# EAGLE board Analog-Digital-Mux_Breakout_Panel_v11 (EAGLE 7.4.0), part 1 of 3
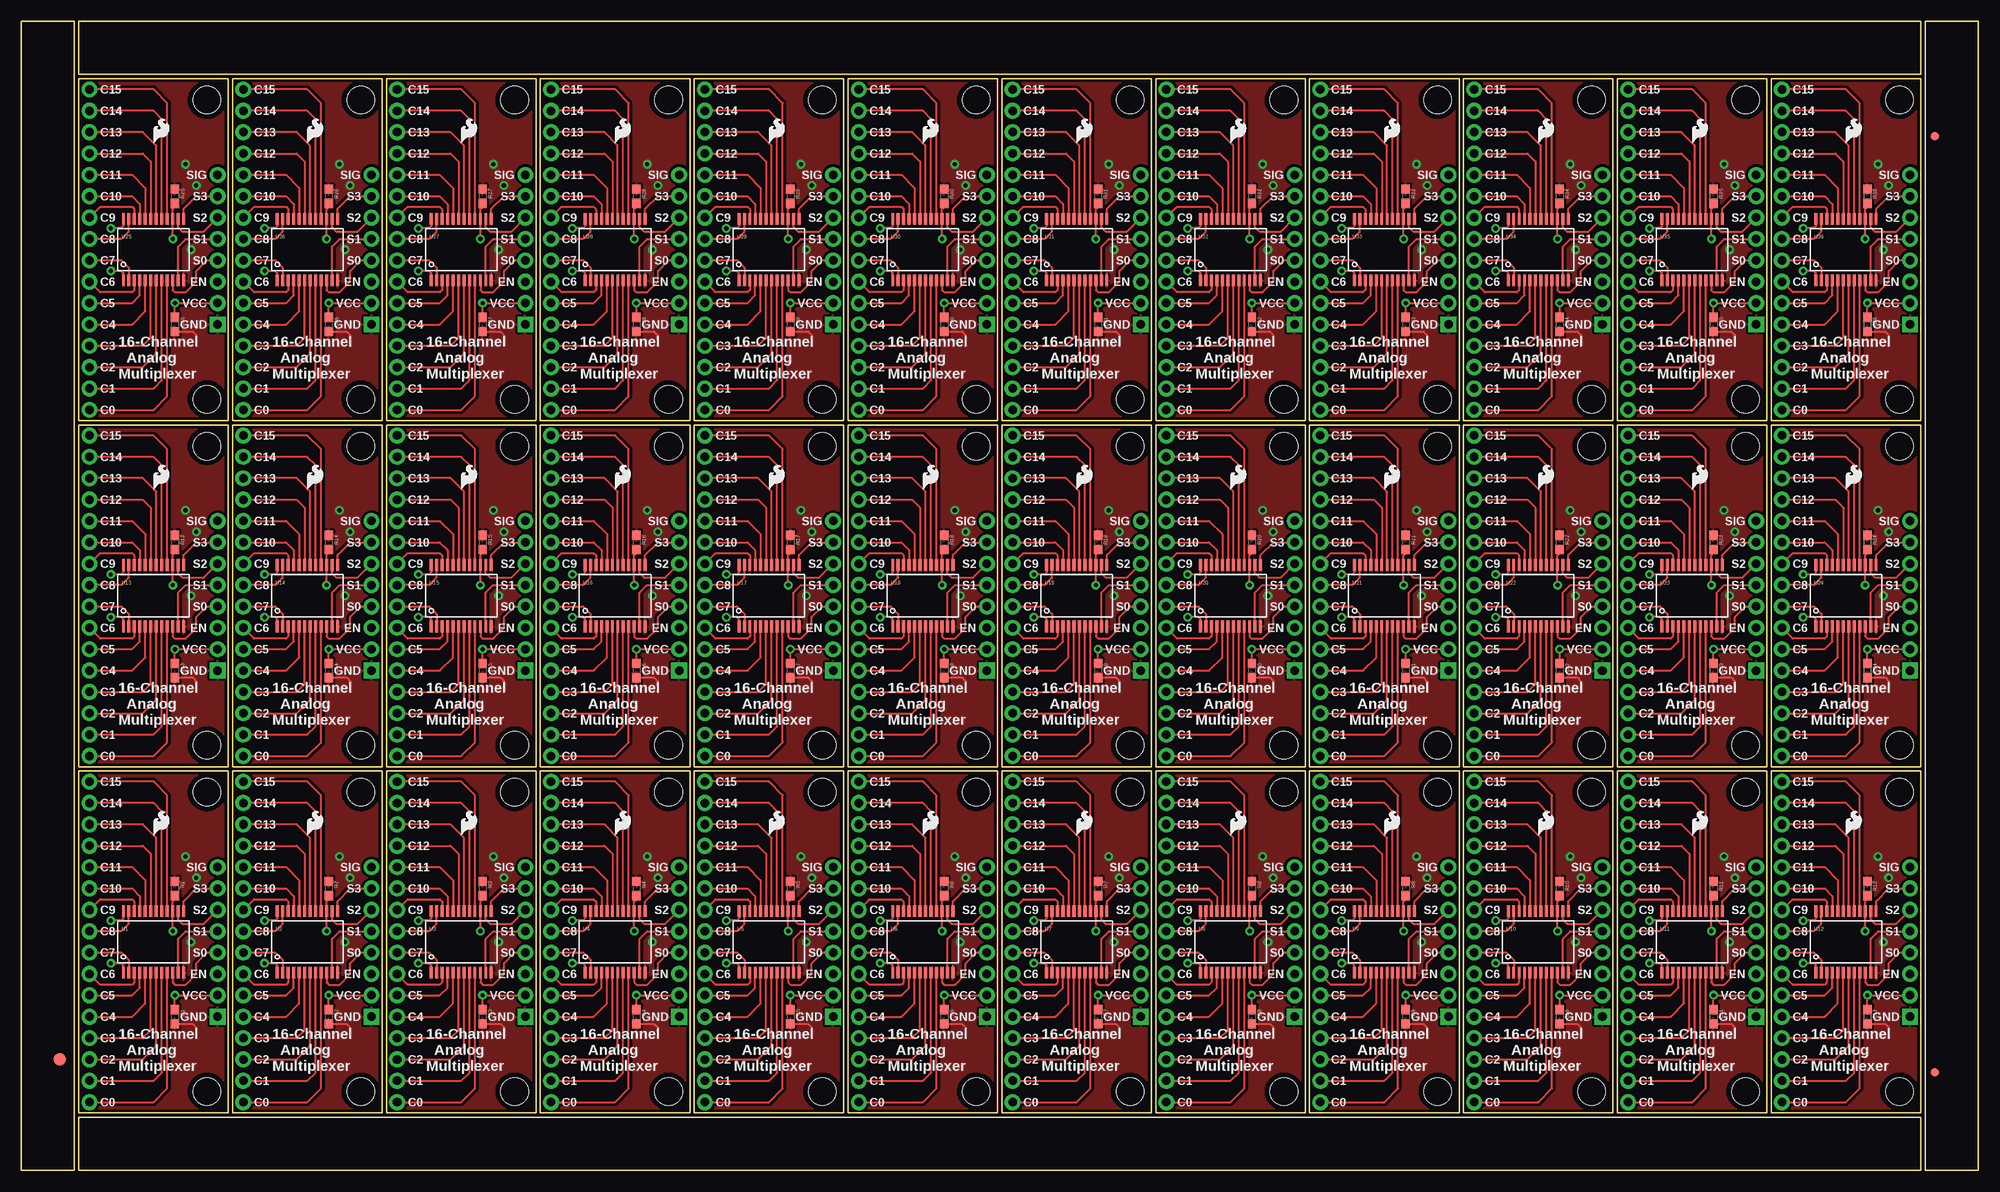
[diagram p0: board, top side]
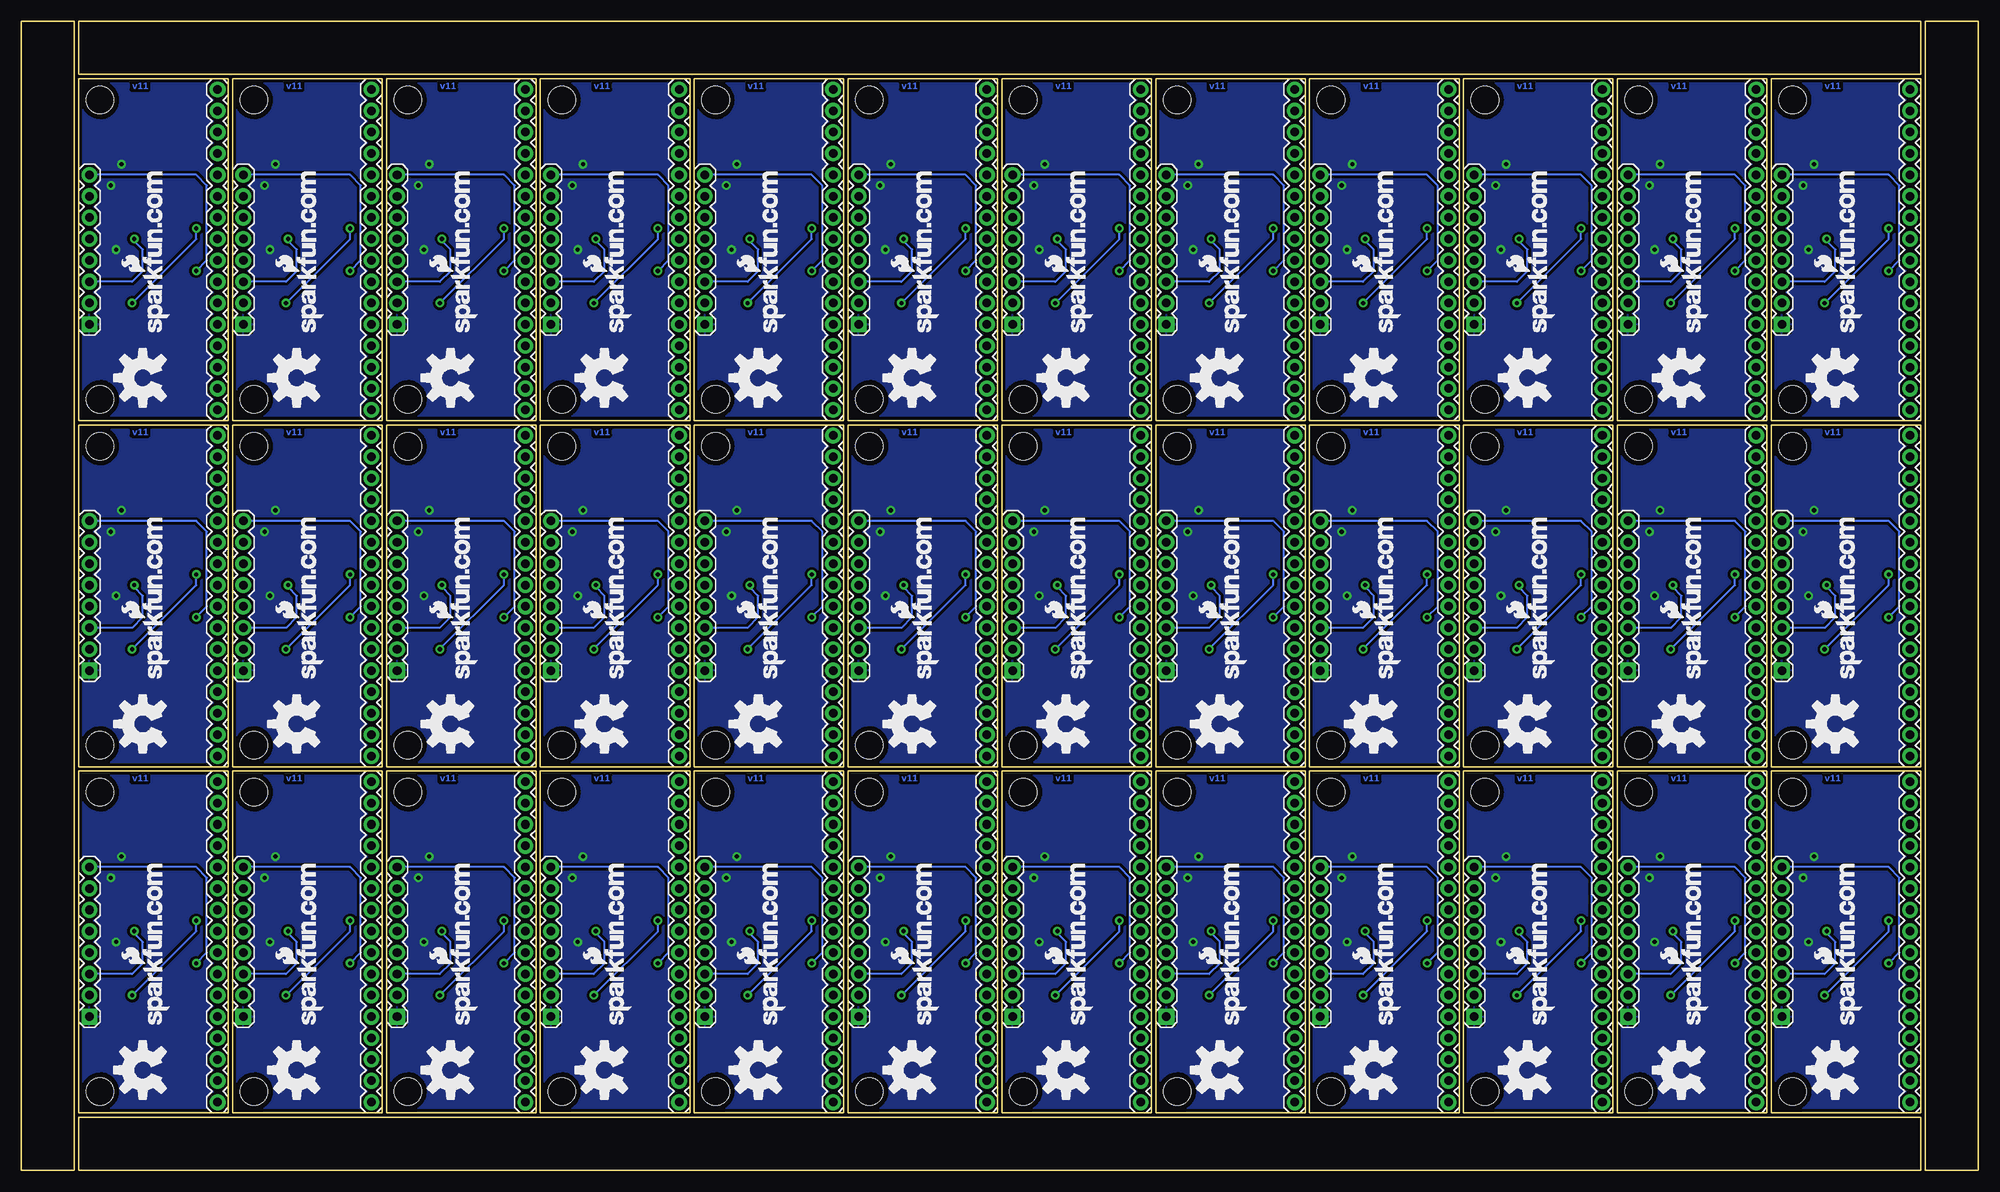
[diagram p1: board, bottom side, seen from below]

Size 232.66 x 136.65 mm. Coordinates in mm from the lower left corner, seen from the top.
Outline: 6.35,79.25 6.35,0 0,0 0,29.72
Outline: 0,27.18 0,136.65 6.35,136.65 6.35,76.71
Outline: 79.25,0 6.86,0 6.86,6.35 29.72,6.35
Outline: 27.18,6.35 225.81,6.35 225.81,0 76.71,0
Outline: 232.66,79.25 232.66,0 226.31,0 226.31,29.72
Outline: 226.31,27.18 226.31,136.65 232.66,136.65 232.66,76.71
Outline: 153.42,136.65 225.81,136.65 225.81,130.3 202.95,130.3
Outline: 205.49,130.3 6.86,130.3 6.86,136.65 155.96,136.65
Outline: 6.86,6.86 24.64,6.86 24.64,47.5 6.86,47.5 6.86,6.86
Outline: 25.15,6.86 42.93,6.86 42.93,47.5 25.15,47.5 25.15,6.86
Outline: 43.43,6.86 61.21,6.86 61.21,47.5 43.43,47.5 43.43,6.86
Outline: 61.72,6.86 79.5,6.86 79.5,47.5 61.72,47.5 61.72,6.86
Outline: 80.01,6.86 97.79,6.86 97.79,47.5 80.01,47.5 80.01,6.86
Outline: 98.3,6.86 116.08,6.86 116.08,47.5 98.3,47.5 98.3,6.86
Outline: 116.59,6.86 134.37,6.86 134.37,47.5 116.59,47.5 116.59,6.86
Outline: 134.87,6.86 152.65,6.86 152.65,47.5 134.87,47.5 134.87,6.86
Outline: 153.16,6.86 170.94,6.86 170.94,47.5 153.16,47.5 153.16,6.86
Outline: 171.45,6.86 189.23,6.86 189.23,47.5 171.45,47.5 171.45,6.86
Outline: 189.74,6.86 207.52,6.86 207.52,47.5 189.74,47.5 189.74,6.86
Outline: 208.03,6.86 225.81,6.86 225.81,47.5 208.03,47.5 208.03,6.86
Outline: 6.86,48.01 24.64,48.01 24.64,88.65 6.86,88.65 6.86,48.01
Outline: 25.15,48.01 42.93,48.01 42.93,88.65 25.15,88.65 25.15,48.01
Outline: 43.43,48.01 61.21,48.01 61.21,88.65 43.43,88.65 43.43,48.01
Outline: 61.72,48.01 79.5,48.01 79.5,88.65 61.72,88.65 61.72,48.01
Outline: 80.01,48.01 97.79,48.01 97.79,88.65 80.01,88.65 80.01,48.01
Outline: 98.3,48.01 116.08,48.01 116.08,88.65 98.3,88.65 98.3,48.01
Outline: 116.59,48.01 134.37,48.01 134.37,88.65 116.59,88.65 116.59,48.01
Outline: 134.87,48.01 152.65,48.01 152.65,88.65 134.87,88.65 134.87,48.01
Outline: 153.16,48.01 170.94,48.01 170.94,88.65 153.16,88.65 153.16,48.01
Outline: 171.45,48.01 189.23,48.01 189.23,88.65 171.45,88.65 171.45,48.01
Outline: 189.74,48.01 207.52,48.01 207.52,88.65 189.74,88.65 189.74,48.01
Outline: 208.03,48.01 225.81,48.01 225.81,88.65 208.03,88.65 208.03,48.01
Outline: 6.86,89.15 24.64,89.15 24.64,129.79 6.86,129.79 6.86,89.15
Outline: 25.15,89.15 42.93,89.15 42.93,129.79 25.15,129.79 25.15,89.15
Outline: 43.43,89.15 61.21,89.15 61.21,129.79 43.43,129.79 43.43,89.15
Outline: 61.72,89.15 79.5,89.15 79.5,129.79 61.72,129.79 61.72,89.15
Outline: 80.01,89.15 97.79,89.15 97.79,129.79 80.01,129.79 80.01,89.15
Outline: 98.3,89.15 116.08,89.15 116.08,129.79 98.3,129.79 98.3,89.15
Outline: 116.59,89.15 134.37,89.15 134.37,129.79 116.59,129.79 116.59,89.15
Outline: 134.87,89.15 152.65,89.15 152.65,129.79 134.87,129.79 134.87,89.15
Outline: 153.16,89.15 170.94,89.15 170.94,129.79 153.16,129.79 153.16,89.15
Outline: 171.45,89.15 189.23,89.15 189.23,129.79 171.45,129.79 171.45,89.15
Outline: 189.74,89.15 207.52,89.15 207.52,129.79 189.74,129.79 189.74,89.15
Outline: 208.03,89.15 225.81,89.15 225.81,129.79 208.03,129.79 208.03,89.15
Copper layers (1*16): Top 0.035mm / dielectric 1.5mm / Bottom 0.035mm
Design rules "SparkFun": minimum track width 8mil, minimum drill 20mil, track to track 8mil, track to pad 8mil, pad to pad 8mil, via to via 8mil, smd to smd 8mil, copper to edge 10mil, drill to drill 8mil, minimum pad ring 12mil, minimum via ring 10mil, stop-mask expansion 4mil, vias tented up to drill 25mil, thermal gap 10mil

## Footprints (pad centres in the part's own frame; a part is rotated, then mirrored left to right if it is on the bottom)
0603 = smd 1.1 x 1: 1 -0.85,0; 2 0.85,0
FIDUCIAL-1.5X3 = smd 1.5 x 1.5: 1 0,0
FIDUCIAL-1X2 = smd 1 x 1: 1 0,0
1X16 = drill 1.016 pad 1.88: 1 0,0; 2 2.54,0; 3 5.08,0; 4 7.62,0; 5 10.16,0; 6 12.7,0; 7 15.24,0; 8 17.78,0; 9 20.32,0; 10 22.86,0; 11 25.4,0; 12 27.94,0; 13 30.48,0; 14 33.02,0; 15 35.56,0; 16 38.1,0
1X08 = drill 1.016 pad 1.88 square: 1 0,0 | drill 1.016 pad 1.88: 2 2.54,0; 3 5.08,0; 4 7.62,0; 5 10.16,0; 6 12.7,0; 7 15.24,0; 8 17.78,0
STAND-OFF = hole 3.302: 0,0
SSOP24 = smd 0.348 x 1.397: 1 -3.575,-3.656; 2 -2.925,-3.656; 3 -2.275,-3.656; 4 -1.625,-3.656; 5 -0.975,-3.656; 6 -0.325,-3.656; 7 0.325,-3.656; 8 0.975,-3.656; 9 1.625,-3.656; 10 2.275,-3.656; 11 2.925,-3.656; 12 3.575,-3.656; 13 3.575,3.656; 14 2.925,3.656; 15 2.275,3.656; 16 1.625,3.656; 17 0.975,3.656; 18 0.325,3.656; 19 -0.325,3.656; 20 -0.975,3.656; 21 -1.625,3.656; 22 -2.275,3.656; 23 -2.925,3.656; 24 -3.575,3.656

## Placement (x,y rotation side)
C1  0.1uF  [0603]  18.29,18.29 270 top
C2  0.1uF  [0603]  36.58,18.29 270 top
C3  0.1uF  [0603]  54.86,18.29 270 top
C4  0.1uF  [0603]  73.15,18.29 270 top
C5  0.1uF  [0603]  91.44,18.29 270 top
C6  0.1uF  [0603]  109.73,18.29 270 top
C7  0.1uF  [0603]  128.02,18.29 270 top
C8  0.1uF  [0603]  146.3,18.29 270 top
C9  0.1uF  [0603]  164.59,18.29 270 top
C10  0.1uF  [0603]  182.88,18.29 270 top
C11  0.1uF  [0603]  201.17,18.29 270 top
C12  0.1uF  [0603]  219.46,18.29 270 top
C13  0.1uF  [0603]  18.29,59.44 270 top
C14  0.1uF  [0603]  36.58,59.44 270 top
C15  0.1uF  [0603]  54.86,59.44 270 top
C16  0.1uF  [0603]  73.15,59.44 270 top
C17  0.1uF  [0603]  91.44,59.44 270 top
C18  0.1uF  [0603]  109.73,59.44 270 top
C19  0.1uF  [0603]  128.02,59.44 270 top
C20  0.1uF  [0603]  146.3,59.44 270 top
C21  0.1uF  [0603]  164.59,59.44 270 top
C22  0.1uF  [0603]  182.88,59.44 270 top
C23  0.1uF  [0603]  201.17,59.44 270 top
C24  0.1uF  [0603]  219.46,59.44 270 top
C25  0.1uF  [0603]  18.29,100.58 270 top
C26  0.1uF  [0603]  36.58,100.58 270 top
C27  0.1uF  [0603]  54.86,100.58 270 top
C28  0.1uF  [0603]  73.15,100.58 270 top
C29  0.1uF  [0603]  91.44,100.58 270 top
C30  0.1uF  [0603]  109.73,100.58 270 top
C31  0.1uF  [0603]  128.02,100.58 270 top
C32  0.1uF  [0603]  146.3,100.58 270 top
C33  0.1uF  [0603]  164.59,100.58 270 top
C34  0.1uF  [0603]  182.88,100.58 270 top
C35  0.1uF  [0603]  201.17,100.58 270 top
C36  0.1uF  [0603]  219.46,100.58 270 top
E$1  [FIDUCIAL-1.5X3]  4.57,13.21 0 top
E$5  [FIDUCIAL-1X2]  227.46,11.68 0 top
E$6  [FIDUCIAL-1X2]  227.46,122.94 180 top
JP1  [1X16]  8.13,8.13 90 bottom
JP2  [1X16]  26.42,8.13 90 bottom
JP3  [1X08]  23.37,18.29 90 bottom
JP4  [1X08]  41.66,18.29 90 bottom
JP5  [1X16]  44.7,8.13 90 bottom
JP6  [1X08]  59.94,18.29 90 bottom
JP7  [1X16]  62.99,8.13 90 bottom
JP8  [1X08]  78.23,18.29 90 bottom
JP9  [1X16]  81.28,8.13 90 bottom
JP10  [1X08]  96.52,18.29 90 bottom
JP11  [1X16]  99.57,8.13 90 bottom
JP12  [1X08]  114.81,18.29 90 bottom
JP13  [1X16]  117.86,8.13 90 bottom
JP14  [1X08]  133.1,18.29 90 bottom
JP15  [1X16]  136.14,8.13 90 bottom
JP16  [1X08]  151.38,18.29 90 bottom
JP17  [1X16]  154.43,8.13 90 bottom
JP18  [1X08]  169.67,18.29 90 bottom
JP19  [1X16]  172.72,8.13 90 bottom
JP20  [1X08]  187.96,18.29 90 bottom
JP21  [1X16]  191.01,8.13 90 bottom
JP22  [1X08]  206.25,18.29 90 bottom
JP23  [1X16]  209.3,8.13 90 bottom
JP24  [1X08]  224.54,18.29 90 bottom
JP25  [1X16]  8.13,49.28 90 bottom
JP26  [1X08]  23.37,59.44 90 bottom
JP27  [1X16]  26.42,49.28 90 bottom
JP28  [1X08]  41.66,59.44 90 bottom
JP29  [1X16]  44.7,49.28 90 bottom
JP30  [1X08]  59.94,59.44 90 bottom
JP31  [1X16]  62.99,49.28 90 bottom
JP32  [1X08]  78.23,59.44 90 bottom
JP33  [1X16]  81.28,49.28 90 bottom
JP34  [1X08]  96.52,59.44 90 bottom
JP35  [1X16]  99.57,49.28 90 bottom
JP36  [1X08]  114.81,59.44 90 bottom
JP37  [1X16]  117.86,49.28 90 bottom
JP38  [1X08]  133.1,59.44 90 bottom
JP39  [1X16]  136.14,49.28 90 bottom
JP40  [1X08]  151.38,59.44 90 bottom
JP41  [1X16]  154.43,49.28 90 bottom
JP42  [1X08]  169.67,59.44 90 bottom
JP43  [1X16]  172.72,49.28 90 bottom
JP44  [1X08]  187.96,59.44 90 bottom
JP45  [1X16]  191.01,49.28 90 bottom
JP46  [1X08]  206.25,59.44 90 bottom
JP47  [1X16]  209.3,49.28 90 bottom
JP48  [1X08]  224.54,59.44 90 bottom
JP49  [1X16]  8.13,90.42 90 bottom
JP50  [1X08]  23.37,100.58 90 bottom
JP51  [1X16]  26.42,90.42 90 bottom
JP52  [1X08]  41.66,100.58 90 bottom
JP53  [1X16]  44.7,90.42 90 bottom
JP54  [1X08]  59.94,100.58 90 bottom
JP55  [1X16]  62.99,90.42 90 bottom
JP56  [1X08]  78.23,100.58 90 bottom
JP57  [1X16]  81.28,90.42 90 bottom
JP58  [1X08]  96.52,100.58 90 bottom
JP59  [1X16]  99.57,90.42 90 bottom
JP60  [1X08]  114.81,100.58 90 bottom
JP61  [1X16]  117.86,90.42 90 bottom
JP62  [1X08]  133.1,100.58 90 bottom
JP63  [1X16]  136.14,90.42 90 bottom
JP64  [1X08]  151.38,100.58 90 bottom
JP65  [1X16]  154.43,90.42 90 bottom
JP66  [1X08]  169.67,100.58 90 bottom
JP67  [1X16]  172.72,90.42 90 bottom
JP68  [1X08]  187.96,100.58 90 bottom
JP69  [1X16]  191.01,90.42 90 bottom
JP70  [1X08]  206.25,100.58 90 bottom
JP71  [1X16]  209.3,90.42 90 bottom
JP72  [1X08]  224.54,100.58 90 bottom
LOGO1  OSHW-LOGOL  [OSHW-LOGO-L]  17.02,11.94 90 bottom
LOGO2  LOGO-SFESK  [SFE-LOGO-FLAME]  15.75,39.88 0 top
LOGO3  OSHW-LOGOL  [OSHW-LOGO-L]  35.31,11.94 90 bottom
LOGO4  LOGO-SFESK  [SFE-LOGO-FLAME]  34.04,39.88 0 top
LOGO5  OSHW-LOGOL  [OSHW-LOGO-L]  53.59,11.94 90 bottom
LOGO6  LOGO-SFESK  [SFE-LOGO-FLAME]  52.32,39.88 0 top
LOGO7  OSHW-LOGOL  [OSHW-LOGO-L]  71.88,11.94 90 bottom
LOGO8  LOGO-SFESK  [SFE-LOGO-FLAME]  70.61,39.88 0 top
LOGO9  OSHW-LOGOL  [OSHW-LOGO-L]  90.17,11.94 90 bottom
LOGO10  LOGO-SFESK  [SFE-LOGO-FLAME]  88.9,39.88 0 top
LOGO11  OSHW-LOGOL  [OSHW-LOGO-L]  108.46,11.94 90 bottom
LOGO12  LOGO-SFESK  [SFE-LOGO-FLAME]  107.19,39.88 0 top
LOGO13  OSHW-LOGOL  [OSHW-LOGO-L]  126.75,11.94 90 bottom
LOGO14  LOGO-SFESK  [SFE-LOGO-FLAME]  125.48,39.88 0 top
LOGO15  OSHW-LOGOL  [OSHW-LOGO-L]  145.03,11.94 90 bottom
LOGO16  LOGO-SFESK  [SFE-LOGO-FLAME]  143.76,39.88 0 top
LOGO17  OSHW-LOGOL  [OSHW-LOGO-L]  163.32,11.94 90 bottom
LOGO18  LOGO-SFESK  [SFE-LOGO-FLAME]  162.05,39.88 0 top
LOGO19  OSHW-LOGOL  [OSHW-LOGO-L]  181.61,11.94 90 bottom
LOGO20  LOGO-SFESK  [SFE-LOGO-FLAME]  180.34,39.88 0 top
LOGO21  OSHW-LOGOL  [OSHW-LOGO-L]  199.9,11.94 90 bottom
LOGO22  LOGO-SFESK  [SFE-LOGO-FLAME]  198.63,39.88 0 top
LOGO23  OSHW-LOGOL  [OSHW-LOGO-L]  218.19,11.94 90 bottom
LOGO24  LOGO-SFESK  [SFE-LOGO-FLAME]  216.92,39.88 0 top
LOGO25  OSHW-LOGOL  [OSHW-LOGO-L]  17.02,53.09 90 bottom
LOGO26  LOGO-SFESK  [SFE-LOGO-FLAME]  15.75,81.03 0 top
LOGO27  OSHW-LOGOL  [OSHW-LOGO-L]  35.31,53.09 90 bottom
LOGO28  LOGO-SFESK  [SFE-LOGO-FLAME]  34.04,81.03 0 top
LOGO29  OSHW-LOGOL  [OSHW-LOGO-L]  53.59,53.09 90 bottom
LOGO30  LOGO-SFESK  [SFE-LOGO-FLAME]  52.32,81.03 0 top
LOGO31  OSHW-LOGOL  [OSHW-LOGO-L]  71.88,53.09 90 bottom
LOGO32  LOGO-SFESK  [SFE-LOGO-FLAME]  70.61,81.03 0 top
LOGO33  OSHW-LOGOL  [OSHW-LOGO-L]  90.17,53.09 90 bottom
LOGO34  LOGO-SFESK  [SFE-LOGO-FLAME]  88.9,81.03 0 top
LOGO35  OSHW-LOGOL  [OSHW-LOGO-L]  108.46,53.09 90 bottom
LOGO36  LOGO-SFESK  [SFE-LOGO-FLAME]  107.19,81.03 0 top
LOGO37  OSHW-LOGOL  [OSHW-LOGO-L]  126.75,53.09 90 bottom
LOGO38  LOGO-SFESK  [SFE-LOGO-FLAME]  125.48,81.03 0 top
LOGO39  OSHW-LOGOL  [OSHW-LOGO-L]  145.03,53.09 90 bottom
LOGO40  LOGO-SFESK  [SFE-LOGO-FLAME]  143.76,81.03 0 top
LOGO41  OSHW-LOGOL  [OSHW-LOGO-L]  163.32,53.09 90 bottom
LOGO42  LOGO-SFESK  [SFE-LOGO-FLAME]  162.05,81.03 0 top
LOGO43  OSHW-LOGOL  [OSHW-LOGO-L]  181.61,53.09 90 bottom
LOGO44  LOGO-SFESK  [SFE-LOGO-FLAME]  180.34,81.03 0 top
LOGO45  OSHW-LOGOL  [OSHW-LOGO-L]  199.9,53.09 90 bottom
LOGO46  LOGO-SFESK  [SFE-LOGO-FLAME]  198.63,81.03 0 top
LOGO47  OSHW-LOGOL  [OSHW-LOGO-L]  218.19,53.09 90 bottom
LOGO48  LOGO-SFESK  [SFE-LOGO-FLAME]  216.92,81.03 0 top
LOGO49  OSHW-LOGOL  [OSHW-LOGO-L]  17.02,94.23 90 bottom
LOGO50  LOGO-SFESK  [SFE-LOGO-FLAME]  15.75,122.17 0 top
LOGO51  OSHW-LOGOL  [OSHW-LOGO-L]  35.31,94.23 90 bottom
LOGO52  LOGO-SFESK  [SFE-LOGO-FLAME]  34.04,122.17 0 top
LOGO53  OSHW-LOGOL  [OSHW-LOGO-L]  53.59,94.23 90 bottom
LOGO54  LOGO-SFESK  [SFE-LOGO-FLAME]  52.32,122.17 0 top
LOGO55  OSHW-LOGOL  [OSHW-LOGO-L]  71.88,94.23 90 bottom
LOGO56  LOGO-SFESK  [SFE-LOGO-FLAME]  70.61,122.17 0 top
LOGO57  OSHW-LOGOL  [OSHW-LOGO-L]  90.17,94.23 90 bottom
LOGO58  LOGO-SFESK  [SFE-LOGO-FLAME]  88.9,122.17 0 top
LOGO59  OSHW-LOGOL  [OSHW-LOGO-L]  108.46,94.23 90 bottom
LOGO60  LOGO-SFESK  [SFE-LOGO-FLAME]  107.19,122.17 0 top
LOGO61  OSHW-LOGOL  [OSHW-LOGO-L]  126.75,94.23 90 bottom
LOGO62  LOGO-SFESK  [SFE-LOGO-FLAME]  125.48,122.17 0 top
LOGO63  OSHW-LOGOL  [OSHW-LOGO-L]  145.03,94.23 90 bottom
LOGO64  LOGO-SFESK  [SFE-LOGO-FLAME]  143.76,122.17 0 top
LOGO65  OSHW-LOGOL  [OSHW-LOGO-L]  163.32,94.23 90 bottom
LOGO66  LOGO-SFESK  [SFE-LOGO-FLAME]  162.05,122.17 0 top
LOGO67  OSHW-LOGOL  [OSHW-LOGO-L]  181.61,94.23 90 bottom
LOGO68  LOGO-SFESK  [SFE-LOGO-FLAME]  180.34,122.17 0 top
LOGO69  OSHW-LOGOL  [OSHW-LOGO-L]  199.9,94.23 90 bottom
LOGO70  LOGO-SFESK  [SFE-LOGO-FLAME]  198.63,122.17 0 top
LOGO71  OSHW-LOGOL  [OSHW-LOGO-L]  218.19,94.23 90 bottom
LOGO72  LOGO-SFESK  [SFE-LOGO-FLAME]  216.92,122.17 0 top
R1  10K  [0603]  18.29,33.53 270 top
R2  10K  [0603]  36.58,33.53 270 top
R3  10K  [0603]  54.86,33.53 270 top
R4  10K  [0603]  73.15,33.53 270 top
R5  10K  [0603]  91.44,33.53 270 top
R6  10K  [0603]  109.73,33.53 270 top
R7  10K  [0603]  128.02,33.53 270 top
R8  10K  [0603]  146.3,33.53 270 top
R9  10K  [0603]  164.59,33.53 270 top
R10  10K  [0603]  182.88,33.53 270 top
R11  10K  [0603]  201.17,33.53 270 top
R12  10K  [0603]  219.46,33.53 270 top
R13  10K  [0603]  18.29,74.68 270 top
R14  10K  [0603]  36.58,74.68 270 top
R15  10K  [0603]  54.86,74.68 270 top
R16  10K  [0603]  73.15,74.68 270 top
R17  10K  [0603]  91.44,74.68 270 top
R18  10K  [0603]  109.73,74.68 270 top
R19  10K  [0603]  128.02,74.68 270 top
R20  10K  [0603]  146.3,74.68 270 top
R21  10K  [0603]  164.59,74.68 270 top
R22  10K  [0603]  182.88,74.68 270 top
R23  10K  [0603]  201.17,74.68 270 top
R24  10K  [0603]  219.46,74.68 270 top
R25  10K  [0603]  18.29,115.82 270 top
R26  10K  [0603]  36.58,115.82 270 top
R27  10K  [0603]  54.86,115.82 270 top
R28  10K  [0603]  73.15,115.82 270 top
R29  10K  [0603]  91.44,115.82 270 top
R30  10K  [0603]  109.73,115.82 270 top
R31  10K  [0603]  128.02,115.82 270 top
R32  10K  [0603]  146.3,115.82 270 top
R33  10K  [0603]  164.59,115.82 270 top
R34  10K  [0603]  182.88,115.82 270 top
R35  10K  [0603]  201.17,115.82 270 top
R36  10K  [0603]  219.46,115.82 270 top
STANDOFF1  STAND-OFF  [STAND-OFF]  22.1,44.96 0 top
STANDOFF2  STAND-OFF  [STAND-OFF]  22.1,9.4 0 top
STANDOFF3  STAND-OFF  [STAND-OFF]  40.39,44.96 0 top
STANDOFF4  STAND-OFF  [STAND-OFF]  40.39,9.4 0 top
STANDOFF5  STAND-OFF  [STAND-OFF]  58.67,44.96 0 top
STANDOFF6  STAND-OFF  [STAND-OFF]  58.67,9.4 0 top
STANDOFF7  STAND-OFF  [STAND-OFF]  76.96,44.96 0 top
STANDOFF8  STAND-OFF  [STAND-OFF]  76.96,9.4 0 top
STANDOFF9  STAND-OFF  [STAND-OFF]  95.25,44.96 0 top
STANDOFF10  STAND-OFF  [STAND-OFF]  95.25,9.4 0 top
STANDOFF11  STAND-OFF  [STAND-OFF]  113.54,44.96 0 top
STANDOFF12  STAND-OFF  [STAND-OFF]  113.54,9.4 0 top
STANDOFF13  STAND-OFF  [STAND-OFF]  131.83,44.96 0 top
STANDOFF14  STAND-OFF  [STAND-OFF]  131.83,9.4 0 top
STANDOFF15  STAND-OFF  [STAND-OFF]  150.11,44.96 0 top
STANDOFF16  STAND-OFF  [STAND-OFF]  150.11,9.4 0 top
STANDOFF17  STAND-OFF  [STAND-OFF]  168.4,44.96 0 top
STANDOFF18  STAND-OFF  [STAND-OFF]  168.4,9.4 0 top
STANDOFF19  STAND-OFF  [STAND-OFF]  186.69,44.96 0 top
STANDOFF20  STAND-OFF  [STAND-OFF]  186.69,9.4 0 top
STANDOFF21  STAND-OFF  [STAND-OFF]  204.98,44.96 0 top
STANDOFF22  STAND-OFF  [STAND-OFF]  204.98,9.4 0 top
STANDOFF23  STAND-OFF  [STAND-OFF]  223.27,44.96 0 top
STANDOFF24  STAND-OFF  [STAND-OFF]  223.27,9.4 0 top
STANDOFF25  STAND-OFF  [STAND-OFF]  22.1,86.11 0 top
STANDOFF26  STAND-OFF  [STAND-OFF]  22.1,50.55 0 top
STANDOFF27  STAND-OFF  [STAND-OFF]  40.39,86.11 0 top
STANDOFF28  STAND-OFF  [STAND-OFF]  40.39,50.55 0 top
STANDOFF29  STAND-OFF  [STAND-OFF]  58.67,86.11 0 top
STANDOFF30  STAND-OFF  [STAND-OFF]  58.67,50.55 0 top
STANDOFF31  STAND-OFF  [STAND-OFF]  76.96,86.11 0 top
STANDOFF32  STAND-OFF  [STAND-OFF]  76.96,50.55 0 top
STANDOFF33  STAND-OFF  [STAND-OFF]  95.25,86.11 0 top
STANDOFF34  STAND-OFF  [STAND-OFF]  95.25,50.55 0 top
STANDOFF35  STAND-OFF  [STAND-OFF]  113.54,86.11 0 top
STANDOFF36  STAND-OFF  [STAND-OFF]  113.54,50.55 0 top
STANDOFF37  STAND-OFF  [STAND-OFF]  131.83,86.11 0 top
STANDOFF38  STAND-OFF  [STAND-OFF]  131.83,50.55 0 top
STANDOFF39  STAND-OFF  [STAND-OFF]  150.11,86.11 0 top
STANDOFF40  STAND-OFF  [STAND-OFF]  150.11,50.55 0 top
STANDOFF41  STAND-OFF  [STAND-OFF]  168.4,86.11 0 top
STANDOFF42  STAND-OFF  [STAND-OFF]  168.4,50.55 0 top
STANDOFF43  STAND-OFF  [STAND-OFF]  186.69,86.11 0 top
STANDOFF44  STAND-OFF  [STAND-OFF]  186.69,50.55 0 top
STANDOFF45  STAND-OFF  [STAND-OFF]  204.98,86.11 0 top
STANDOFF46  STAND-OFF  [STAND-OFF]  204.98,50.55 0 top
STANDOFF47  STAND-OFF  [STAND-OFF]  223.27,86.11 0 top
STANDOFF48  STAND-OFF  [STAND-OFF]  223.27,50.55 0 top
STANDOFF49  STAND-OFF  [STAND-OFF]  22.1,127.25 0 top
STANDOFF50  STAND-OFF  [STAND-OFF]  22.1,91.69 0 top
STANDOFF51  STAND-OFF  [STAND-OFF]  40.39,127.25 0 top
STANDOFF52  STAND-OFF  [STAND-OFF]  40.39,91.69 0 top
STANDOFF53  STAND-OFF  [STAND-OFF]  58.67,127.25 0 top
STANDOFF54  STAND-OFF  [STAND-OFF]  58.67,91.69 0 top
STANDOFF55  STAND-OFF  [STAND-OFF]  76.96,127.25 0 top
STANDOFF56  STAND-OFF  [STAND-OFF]  76.96,91.69 0 top
STANDOFF57  STAND-OFF  [STAND-OFF]  95.25,127.25 0 top
STANDOFF58  STAND-OFF  [STAND-OFF]  95.25,91.69 0 top
STANDOFF59  STAND-OFF  [STAND-OFF]  113.54,127.25 0 top
STANDOFF60  STAND-OFF  [STAND-OFF]  113.54,91.69 0 top
STANDOFF61  STAND-OFF  [STAND-OFF]  131.83,127.25 0 top
STANDOFF62  STAND-OFF  [STAND-OFF]  131.83,91.69 0 top
STANDOFF63  STAND-OFF  [STAND-OFF]  150.11,127.25 0 top
STANDOFF64  STAND-OFF  [STAND-OFF]  150.11,91.69 0 top
STANDOFF65  STAND-OFF  [STAND-OFF]  168.4,127.25 0 top
STANDOFF66  STAND-OFF  [STAND-OFF]  168.4,91.69 0 top
STANDOFF67  STAND-OFF  [STAND-OFF]  186.69,127.25 0 top
STANDOFF68  STAND-OFF  [STAND-OFF]  186.69,91.69 0 top
STANDOFF69  STAND-OFF  [STAND-OFF]  204.98,127.25 0 top
STANDOFF70  STAND-OFF  [STAND-OFF]  204.98,91.69 0 top
STANDOFF71  STAND-OFF  [STAND-OFF]  223.27,127.25 0 top
STANDOFF72  STAND-OFF  [STAND-OFF]  223.27,91.69 0 top
U1  MUX-74HC4067  [SSOP24]  15.75,27.18 0 top
U2  MUX-74HC4067  [SSOP24]  34.04,27.18 0 top
U3  MUX-74HC4067  [SSOP24]  52.32,27.18 0 top
U4  MUX-74HC4067  [SSOP24]  70.61,27.18 0 top
U5  MUX-74HC4067  [SSOP24]  88.9,27.18 0 top
U6  MUX-74HC4067  [SSOP24]  107.19,27.18 0 top
U7  MUX-74HC4067  [SSOP24]  125.48,27.18 0 top
U8  MUX-74HC4067  [SSOP24]  143.76,27.18 0 top
U9  MUX-74HC4067  [SSOP24]  162.05,27.18 0 top
U10  MUX-74HC4067  [SSOP24]  180.34,27.18 0 top
U11  MUX-74HC4067  [SSOP24]  198.63,27.18 0 top
U12  MUX-74HC4067  [SSOP24]  216.92,27.18 0 top
U13  MUX-74HC4067  [SSOP24]  15.75,68.33 0 top
U14  MUX-74HC4067  [SSOP24]  34.04,68.33 0 top
U15  MUX-74HC4067  [SSOP24]  52.32,68.33 0 top
U16  MUX-74HC4067  [SSOP24]  70.61,68.33 0 top
U17  MUX-74HC4067  [SSOP24]  88.9,68.33 0 top
U18  MUX-74HC4067  [SSOP24]  107.19,68.33 0 top
U19  MUX-74HC4067  [SSOP24]  125.48,68.33 0 top
U20  MUX-74HC4067  [SSOP24]  143.76,68.33 0 top
U21  MUX-74HC4067  [SSOP24]  162.05,68.33 0 top
U22  MUX-74HC4067  [SSOP24]  180.34,68.33 0 top
U23  MUX-74HC4067  [SSOP24]  198.63,68.33 0 top
U24  MUX-74HC4067  [SSOP24]  216.92,68.33 0 top
U25  MUX-74HC4067  [SSOP24]  15.75,109.47 0 top
U26  MUX-74HC4067  [SSOP24]  34.04,109.47 0 top
U27  MUX-74HC4067  [SSOP24]  52.32,109.47 0 top
U28  MUX-74HC4067  [SSOP24]  70.61,109.47 0 top
U29  MUX-74HC4067  [SSOP24]  88.9,109.47 0 top
U30  MUX-74HC4067  [SSOP24]  107.19,109.47 0 top
U31  MUX-74HC4067  [SSOP24]  125.48,109.47 0 top
U32  MUX-74HC4067  [SSOP24]  143.76,109.47 0 top
U33  MUX-74HC4067  [SSOP24]  162.05,109.47 0 top
U34  MUX-74HC4067  [SSOP24]  180.34,109.47 0 top
U35  MUX-74HC4067  [SSOP24]  198.63,109.47 0 top
U36  MUX-74HC4067  [SSOP24]  216.92,109.47 0 top
U$1  LOGO-SFENEW  [SFE-NEW-WEBLOGO]  13.84,17.4 90 bottom
U$2  LOGO-SFENEW  [SFE-NEW-WEBLOGO]  32.13,17.4 90 bottom
U$3  LOGO-SFENEW  [SFE-NEW-WEBLOGO]  50.42,17.4 90 bottom
U$4  LOGO-SFENEW  [SFE-NEW-WEBLOGO]  68.71,17.4 90 bottom
U$5  LOGO-SFENEW  [SFE-NEW-WEBLOGO]  87,17.4 90 bottom
U$6  LOGO-SFENEW  [SFE-NEW-WEBLOGO]  105.28,17.4 90 bottom
U$7  LOGO-SFENEW  [SFE-NEW-WEBLOGO]  123.57,17.4 90 bottom
U$8  LOGO-SFENEW  [SFE-NEW-WEBLOGO]  141.86,17.4 90 bottom
U$9  LOGO-SFENEW  [SFE-NEW-WEBLOGO]  160.15,17.4 90 bottom
U$10  LOGO-SFENEW  [SFE-NEW-WEBLOGO]  178.44,17.4 90 bottom
U$11  LOGO-SFENEW  [SFE-NEW-WEBLOGO]  196.72,17.4 90 bottom
U$12  LOGO-SFENEW  [SFE-NEW-WEBLOGO]  215.01,17.4 90 bottom
U$13  LOGO-SFENEW  [SFE-NEW-WEBLOGO]  13.84,58.55 90 bottom
U$14  LOGO-SFENEW  [SFE-NEW-WEBLOGO]  32.13,58.55 90 bottom
U$15  LOGO-SFENEW  [SFE-NEW-WEBLOGO]  50.42,58.55 90 bottom
U$16  LOGO-SFENEW  [SFE-NEW-WEBLOGO]  68.71,58.55 90 bottom
U$17  LOGO-SFENEW  [SFE-NEW-WEBLOGO]  87,58.55 90 bottom
U$18  LOGO-SFENEW  [SFE-NEW-WEBLOGO]  105.28,58.55 90 bottom
U$19  LOGO-SFENEW  [SFE-NEW-WEBLOGO]  123.57,58.55 90 bottom
U$20  LOGO-SFENEW  [SFE-NEW-WEBLOGO]  141.86,58.55 90 bottom
U$21  LOGO-SFENEW  [SFE-NEW-WEBLOGO]  160.15,58.55 90 bottom
U$22  LOGO-SFENEW  [SFE-NEW-WEBLOGO]  178.44,58.55 90 bottom
U$23  LOGO-SFENEW  [SFE-NEW-WEBLOGO]  196.72,58.55 90 bottom
U$24  LOGO-SFENEW  [SFE-NEW-WEBLOGO]  215.01,58.55 90 bottom
U$25  LOGO-SFENEW  [SFE-NEW-WEBLOGO]  13.84,99.69 90 bottom
U$26  LOGO-SFENEW  [SFE-NEW-WEBLOGO]  32.13,99.69 90 bottom
U$27  LOGO-SFENEW  [SFE-NEW-WEBLOGO]  50.42,99.69 90 bottom
U$28  LOGO-SFENEW  [SFE-NEW-WEBLOGO]  68.71,99.69 90 bottom
U$29  LOGO-SFENEW  [SFE-NEW-WEBLOGO]  87,99.69 90 bottom
U$30  LOGO-SFENEW  [SFE-NEW-WEBLOGO]  105.28,99.69 90 bottom
U$31  LOGO-SFENEW  [SFE-NEW-WEBLOGO]  123.57,99.69 90 bottom
U$32  LOGO-SFENEW  [SFE-NEW-WEBLOGO]  141.86,99.69 90 bottom
U$33  LOGO-SFENEW  [SFE-NEW-WEBLOGO]  160.15,99.69 90 bottom
U$34  LOGO-SFENEW  [SFE-NEW-WEBLOGO]  178.44,99.69 90 bottom
U$35  LOGO-SFENEW  [SFE-NEW-WEBLOGO]  196.72,99.69 90 bottom
U$36  LOGO-SFENEW  [SFE-NEW-WEBLOGO]  215.01,99.69 90 bottom

## Library data of the parts
C1-C36 R1-R36 U1-U36 U$1-U$36 = SparkFun
E$1 = SparkFun-Retired
E$5 E$6 LOGO1-LOGO72 = SparkFun-Aesthetics
JP1-JP72 = SparkFun-Connectors
STANDOFF1-STANDOFF72 = SparkFun-Electromechanical

## Nets
C0: JP1.1 U1.9
C1: JP1.2 U1.8
C2: JP1.3 U1.7
C3: JP1.4 U1.6
C4: JP1.5 U1.5
C5: JP1.6 U1.4
C6: JP1.7 U1.3
C7: JP1.8 U1.2
C8: JP1.9 U1.23
C9: JP1.10 U1.22
C10: JP1.11 U1.21
C11: JP1.12 U1.20
C12: JP1.13 U1.19
C13: JP1.14 U1.18
C14: JP1.15 U1.17
C15: JP1.16 U1.16
C16: JP2.1 U2.9
C17: JP2.2 U2.8
C18: JP2.3 U2.7
C19: JP2.4 U2.6
C20: JP2.5 U2.5
C21: JP2.6 U2.4
C22: JP2.7 U2.3
C23: JP2.8 U2.2
C24: JP2.9 U2.23
C25: JP2.10 U2.22
C26: JP2.11 U2.21
C27: JP2.12 U2.20
C28: JP2.13 U2.19
C29: JP2.14 U2.18
C30: JP2.15 U2.17
C31: JP2.16 U2.16
C32: JP5.1 U3.9
C33: JP5.2 U3.8
C34: JP5.3 U3.7
C35: JP5.4 U3.6
C36: JP5.5 U3.5
C37: JP5.6 U3.4
C38: JP5.7 U3.3
C39: JP5.8 U3.2
C40: JP5.9 U3.23
C41: JP5.10 U3.22
C42: JP5.11 U3.21
C43: JP5.12 U3.20
C44: JP5.13 U3.19
C45: JP5.14 U3.18
C46: JP5.15 U3.17
C47: JP5.16 U3.16
C48: JP7.1 U4.9
C49: JP7.2 U4.8
C50: JP7.3 U4.7
C51: JP7.4 U4.6
C52: JP7.5 U4.5
C53: JP7.6 U4.4
C54: JP7.7 U4.3
C55: JP7.8 U4.2
C56: JP7.9 U4.23
C57: JP7.10 U4.22
C58: JP7.11 U4.21
C59: JP7.12 U4.20
C60: JP7.13 U4.19
C61: JP7.14 U4.18
C62: JP7.15 U4.17
C63: JP7.16 U4.16
C64: JP9.1 U5.9
C65: JP9.2 U5.8
C66: JP9.3 U5.7
C67: JP9.4 U5.6
C68: JP9.5 U5.5
C69: JP9.6 U5.4
C70: JP9.7 U5.3
C71: JP9.8 U5.2
C72: JP9.9 U5.23
C73: JP9.10 U5.22
C74: JP9.11 U5.21
C75: JP9.12 U5.20
C76: JP9.13 U5.19
C77: JP9.14 U5.18
C78: JP9.15 U5.17
C79: JP9.16 U5.16
C80: JP11.1 U6.9
C81: JP11.2 U6.8
C82: JP11.3 U6.7
C83: JP11.4 U6.6
C84: JP11.5 U6.5
C85: JP11.6 U6.4
C86: JP11.7 U6.3
C87: JP11.8 U6.2
C88: JP11.9 U6.23
C89: JP11.10 U6.22
C90: JP11.11 U6.21
C91: JP11.12 U6.20
C92: JP11.13 U6.19
C93: JP11.14 U6.18
C94: JP11.15 U6.17
C95: JP11.16 U6.16
C96: JP13.1 U7.9
C97: JP13.2 U7.8
C98: JP13.3 U7.7
C99: JP13.4 U7.6
C100: JP13.5 U7.5
C101: JP13.6 U7.4
C102: JP13.7 U7.3
C103: JP13.8 U7.2
C104: JP13.9 U7.23
C105: JP13.10 U7.22
C106: JP13.11 U7.21
C107: JP13.12 U7.20
C108: JP13.13 U7.19
C109: JP13.14 U7.18
C110: JP13.15 U7.17
C111: JP13.16 U7.16
C112: JP15.1 U8.9
C113: JP15.2 U8.8
C114: JP15.3 U8.7
C115: JP15.4 U8.6
C116: JP15.5 U8.5
C117: JP15.6 U8.4
C118: JP15.7 U8.3
C119: JP15.8 U8.2
C120: JP15.9 U8.23
C121: JP15.10 U8.22
C122: JP15.11 U8.21
C123: JP15.12 U8.20
C124: JP15.13 U8.19
C125: JP15.14 U8.18
C126: JP15.15 U8.17
C127: JP15.16 U8.16
C128: JP17.1 U9.9
C129: JP17.2 U9.8
C130: JP17.3 U9.7
C131: JP17.4 U9.6
C132: JP17.5 U9.5
C133: JP17.6 U9.4
C134: JP17.7 U9.3
C135: JP17.8 U9.2
C136: JP17.9 U9.23
C137: JP17.10 U9.22
C138: JP17.11 U9.21
C139: JP17.12 U9.20
C140: JP17.13 U9.19
C141: JP17.14 U9.18
C142: JP17.15 U9.17
C143: JP17.16 U9.16
C144: JP19.1 U10.9
C145: JP19.2 U10.8
C146: JP19.3 U10.7
C147: JP19.4 U10.6
C148: JP19.5 U10.5
C149: JP19.6 U10.4
C150: JP19.7 U10.3
C151: JP19.8 U10.2
C152: JP19.9 U10.23
C153: JP19.10 U10.22
C154: JP19.11 U10.21
C155: JP19.12 U10.20
C156: JP19.13 U10.19
C157: JP19.14 U10.18
C158: JP19.15 U10.17
C159: JP19.16 U10.16
C160: JP21.1 U11.9
C161: JP21.2 U11.8
C162: JP21.3 U11.7
C163: JP21.4 U11.6
C164: JP21.5 U11.5
C165: JP21.6 U11.4
C166: JP21.7 U11.3
C167: JP21.8 U11.2
C168: JP21.9 U11.23
C169: JP21.10 U11.22
C170: JP21.11 U11.21
C171: JP21.12 U11.20
C172: JP21.13 U11.19
C173: JP21.14 U11.18
C174: JP21.15 U11.17
C175: JP21.16 U11.16
C176: JP23.1 U12.9
C177: JP23.2 U12.8
C178: JP23.3 U12.7
C179: JP23.4 U12.6
C180: JP23.5 U12.5
C181: JP23.6 U12.4
C182: JP23.7 U12.3
C183: JP23.8 U12.2
C184: JP23.9 U12.23
C185: JP23.10 U12.22
C186: JP23.11 U12.21
C187: JP23.12 U12.20
C188: JP23.13 U12.19
C189: JP23.14 U12.18
C190: JP23.15 U12.17
C191: JP23.16 U12.16
C192: JP25.1 U13.9
C193: JP25.2 U13.8
C194: JP25.3 U13.7
C195: JP25.4 U13.6
C196: JP25.5 U13.5
C197: JP25.6 U13.4
C198: JP25.7 U13.3
C199: JP25.8 U13.2
C200: JP25.9 U13.23
C201: JP25.10 U13.22
C202: JP25.11 U13.21
C203: JP25.12 U13.20
C204: JP25.13 U13.19
C205: JP25.14 U13.18
C206: JP25.15 U13.17
C207: JP25.16 U13.16
C208: JP27.1 U14.9
C209: JP27.2 U14.8
C210: JP27.3 U14.7
C211: JP27.4 U14.6
C212: JP27.5 U14.5
C213: JP27.6 U14.4
C214: JP27.7 U14.3
C215: JP27.8 U14.2
C216: JP27.9 U14.23
C217: JP27.10 U14.22
C218: JP27.11 U14.21
C219: JP27.12 U14.20
C220: JP27.13 U14.19
C221: JP27.14 U14.18
C222: JP27.15 U14.17
C223: JP27.16 U14.16
C224: JP29.1 U15.9
C225: JP29.2 U15.8
C226: JP29.3 U15.7
C227: JP29.4 U15.6
C228: JP29.5 U15.5
C229: JP29.6 U15.4
C230: JP29.7 U15.3
C231: JP29.8 U15.2
C232: JP29.9 U15.23
C233: JP29.10 U15.22
C234: JP29.11 U15.21
C235: JP29.12 U15.20
C236: JP29.13 U15.19
C237: JP29.14 U15.18
C238: JP29.15 U15.17
C239: JP29.16 U15.16
C240: JP31.1 U16.9
C241: JP31.2 U16.8
C242: JP31.3 U16.7
C243: JP31.4 U16.6
C244: JP31.5 U16.5
C245: JP31.6 U16.4
C246: JP31.7 U16.3
C247: JP31.8 U16.2
C248: JP31.9 U16.23
C249: JP31.10 U16.22
C250: JP31.11 U16.21
C251: JP31.12 U16.20
C252: JP31.13 U16.19
C253: JP31.14 U16.18
C254: JP31.15 U16.17
C255: JP31.16 U16.16
C256: JP33.1 U17.9
C257: JP33.2 U17.8
C258: JP33.3 U17.7
C259: JP33.4 U17.6
C260: JP33.5 U17.5
C261: JP33.6 U17.4
C262: JP33.7 U17.3
C263: JP33.8 U17.2
C264: JP33.9 U17.23
C265: JP33.10 U17.22
C266: JP33.11 U17.21
C267: JP33.12 U17.20
C268: JP33.13 U17.19
C269: JP33.14 U17.18
C270: JP33.15 U17.17
C271: JP33.16 U17.16
C272: JP35.1 U18.9
C273: JP35.2 U18.8
C274: JP35.3 U18.7
C275: JP35.4 U18.6
C276: JP35.5 U18.5
C277: JP35.6 U18.4
C278: JP35.7 U18.3
C279: JP35.8 U18.2
C280: JP35.9 U18.23
C281: JP35.10 U18.22
C282: JP35.11 U18.21
C283: JP35.12 U18.20
C284: JP35.13 U18.19
C285: JP35.14 U18.18
C286: JP35.15 U18.17
C287: JP35.16 U18.16
C288: JP37.1 U19.9
C289: JP37.2 U19.8
C290: JP37.3 U19.7
C291: JP37.4 U19.6
C292: JP37.5 U19.5
C293: JP37.6 U19.4
C294: JP37.7 U19.3
C295: JP37.8 U19.2
C296: JP37.9 U19.23
C297: JP37.10 U19.22
C298: JP37.11 U19.21
C299: JP37.12 U19.20
C300: JP37.13 U19.19
C301: JP37.14 U19.18
C302: JP37.15 U19.17
C303: JP37.16 U19.16
C304: JP39.1 U20.9
C305: JP39.2 U20.8
C306: JP39.3 U20.7
C307: JP39.4 U20.6
C308: JP39.5 U20.5
C309: JP39.6 U20.4
C310: JP39.7 U20.3
C311: JP39.8 U20.2
C312: JP39.9 U20.23
C313: JP39.10 U20.22
C314: JP39.11 U20.21
C315: JP39.12 U20.20
C316: JP39.13 U20.19
C317: JP39.14 U20.18
C318: JP39.15 U20.17
C319: JP39.16 U20.16
C320: JP41.1 U21.9
C321: JP41.2 U21.8
C322: JP41.3 U21.7
C323: JP41.4 U21.6
C324: JP41.5 U21.5
C325: JP41.6 U21.4
C326: JP41.7 U21.3
C327: JP41.8 U21.2
C328: JP41.9 U21.23
C329: JP41.10 U21.22
C330: JP41.11 U21.21
C331: JP41.12 U21.20
C332: JP41.13 U21.19
C333: JP41.14 U21.18
C334: JP41.15 U21.17
C335: JP41.16 U21.16
C336: JP43.1 U22.9
C337: JP43.2 U22.8
C338: JP43.3 U22.7
C339: JP43.4 U22.6
C340: JP43.5 U22.5
C341: JP43.6 U22.4
C342: JP43.7 U22.3
C343: JP43.8 U22.2
C344: JP43.9 U22.23
C345: JP43.10 U22.22
C346: JP43.11 U22.21
C347: JP43.12 U22.20
C348: JP43.13 U22.19
C349: JP43.14 U22.18
C350: JP43.15 U22.17
C351: JP43.16 U22.16
C352: JP45.1 U23.9
C353: JP45.2 U23.8
C354: JP45.3 U23.7
C355: JP45.4 U23.6
C356: JP45.5 U23.5
C357: JP45.6 U23.4
C358: JP45.7 U23.3
C359: JP45.8 U23.2
C360: JP45.9 U23.23
C361: JP45.10 U23.22
C362: JP45.11 U23.21
C363: JP45.12 U23.20
C364: JP45.13 U23.19
C365: JP45.14 U23.18
C366: JP45.15 U23.17
C367: JP45.16 U23.16
C368: JP47.1 U24.9
C369: JP47.2 U24.8
C370: JP47.3 U24.7
C371: JP47.4 U24.6
C372: JP47.5 U24.5
C373: JP47.6 U24.4
C374: JP47.7 U24.3
C375: JP47.8 U24.2
C376: JP47.9 U24.23
C377: JP47.10 U24.22
C378: JP47.11 U24.21
C379: JP47.12 U24.20
C380: JP47.13 U24.19
C381: JP47.14 U24.18
C382: JP47.15 U24.17
C383: JP47.16 U24.16
C384: JP49.1 U25.9
C385: JP49.2 U25.8
C386: JP49.3 U25.7
C387: JP49.4 U25.6
C388: JP49.5 U25.5
C389: JP49.6 U25.4
C390: JP49.7 U25.3
C391: JP49.8 U25.2
C392: JP49.9 U25.23
C393: JP49.10 U25.22
C394: JP49.11 U25.21
C395: JP49.12 U25.20
C396: JP49.13 U25.19
C397: JP49.14 U25.18
C398: JP49.15 U25.17
C399: JP49.16 U25.16
C400: JP51.1 U26.9
C401: JP51.2 U26.8
C402: JP51.3 U26.7
C403: JP51.4 U26.6
C404: JP51.5 U26.5
C405: JP51.6 U26.4
C406: JP51.7 U26.3
C407: JP51.8 U26.2
C408: JP51.9 U26.23
C409: JP51.10 U26.22
C410: JP51.11 U26.21
C411: JP51.12 U26.20
C412: JP51.13 U26.19
C413: JP51.14 U26.18
C414: JP51.15 U26.17
C415: JP51.16 U26.16
C416: JP53.1 U27.9
C417: JP53.2 U27.8
C418: JP53.3 U27.7
C419: JP53.4 U27.6
C420: JP53.5 U27.5
C421: JP53.6 U27.4
C422: JP53.7 U27.3
C423: JP53.8 U27.2
C424: JP53.9 U27.23
C425: JP53.10 U27.22
C426: JP53.11 U27.21
C427: JP53.12 U27.20
C428: JP53.13 U27.19
C429: JP53.14 U27.18
C430: JP53.15 U27.17
C431: JP53.16 U27.16
C432: JP55.1 U28.9
C433: JP55.2 U28.8
C434: JP55.3 U28.7
C435: JP55.4 U28.6
C436: JP55.5 U28.5
C437: JP55.6 U28.4
C438: JP55.7 U28.3
C439: JP55.8 U28.2
C440: JP55.9 U28.23
C441: JP55.10 U28.22
C442: JP55.11 U28.21
C443: JP55.12 U28.20
C444: JP55.13 U28.19
C445: JP55.14 U28.18
C446: JP55.15 U28.17
C447: JP55.16 U28.16
C448: JP57.1 U29.9
C449: JP57.2 U29.8
C450: JP57.3 U29.7
C451: JP57.4 U29.6
C452: JP57.5 U29.5
C453: JP57.6 U29.4
C454: JP57.7 U29.3
C455: JP57.8 U29.2
C456: JP57.9 U29.23
C457: JP57.10 U29.22
C458: JP57.11 U29.21
C459: JP57.12 U29.20
C460: JP57.13 U29.19
C461: JP57.14 U29.18
C462: JP57.15 U29.17
C463: JP57.16 U29.16
C464: JP59.1 U30.9
C465: JP59.2 U30.8
C466: JP59.3 U30.7
C467: JP59.4 U30.6
C468: JP59.5 U30.5
C469: JP59.6 U30.4
C470: JP59.7 U30.3
C471: JP59.8 U30.2
C472: JP59.9 U30.23
C473: JP59.10 U30.22
C474: JP59.11 U30.21
C475: JP59.12 U30.20
C476: JP59.13 U30.19
C477: JP59.14 U30.18
C478: JP59.15 U30.17
C479: JP59.16 U30.16
C480: JP61.1 U31.9
C481: JP61.2 U31.8
C482: JP61.3 U31.7
C483: JP61.4 U31.6
C484: JP61.5 U31.5
C485: JP61.6 U31.4
C486: JP61.7 U31.3
C487: JP61.8 U31.2
C488: JP61.9 U31.23
C489: JP61.10 U31.22
C490: JP61.11 U31.21
C491: JP61.12 U31.20
C492: JP61.13 U31.19
C493: JP61.14 U31.18
C494: JP61.15 U31.17
C495: JP61.16 U31.16
C496: JP63.1 U32.9
C497: JP63.2 U32.8
C498: JP63.3 U32.7
C499: JP63.4 U32.6
C500: JP63.5 U32.5
C501: JP63.6 U32.4
C502: JP63.7 U32.3
C503: JP63.8 U32.2
C504: JP63.9 U32.23
C505: JP63.10 U32.22
C506: JP63.11 U32.21
C507: JP63.12 U32.20
C508: JP63.13 U32.19
C509: JP63.14 U32.18
C510: JP63.15 U32.17
C511: JP63.16 U32.16
C512: JP65.1 U33.9
C513: JP65.2 U33.8
C514: JP65.3 U33.7
C515: JP65.4 U33.6
C516: JP65.5 U33.5
C517: JP65.6 U33.4
C518: JP65.7 U33.3
C519: JP65.8 U33.2
C520: JP65.9 U33.23
C521: JP65.10 U33.22
C522: JP65.11 U33.21
C523: JP65.12 U33.20
C524: JP65.13 U33.19
C525: JP65.14 U33.18
C526: JP65.15 U33.17
C527: JP65.16 U33.16
C528: JP67.1 U34.9
C529: JP67.2 U34.8
C530: JP67.3 U34.7
C531: JP67.4 U34.6
C532: JP67.5 U34.5
C533: JP67.6 U34.4
C534: JP67.7 U34.3
C535: JP67.8 U34.2
C536: JP67.9 U34.23
C537: JP67.10 U34.22
C538: JP67.11 U34.21
C539: JP67.12 U34.20
C540: JP67.13 U34.19
C541: JP67.14 U34.18
C542: JP67.15 U34.17
C543: JP67.16 U34.16
C544: JP69.1 U35.9
C545: JP69.2 U35.8
C546: JP69.3 U35.7
C547: JP69.4 U35.6
C548: JP69.5 U35.5
C549: JP69.6 U35.4
C550: JP69.7 U35.3
C551: JP69.8 U35.2
C552: JP69.9 U35.23
C553: JP69.10 U35.22
C554: JP69.11 U35.21
C555: JP69.12 U35.20
C556: JP69.13 U35.19
C557: JP69.14 U35.18
C558: JP69.15 U35.17
C559: JP69.16 U35.16
C560: JP71.1 U36.9
C561: JP71.2 U36.8
C562: JP71.3 U36.7
C563: JP71.4 U36.6
C564: JP71.5 U36.5
C565: JP71.6 U36.4
C566: JP71.7 U36.3
C567: JP71.8 U36.2
C568: JP71.9 U36.23
C569: JP71.10 U36.22
C570: JP71.11 U36.21
C571: JP71.12 U36.20
C572: JP71.13 U36.19
C573: JP71.14 U36.18
C574: JP71.15 U36.17
C575: JP71.16 U36.16
EN: JP3.3 R1.2 U1.15
EN1: JP4.3 R2.2 U2.15
EN2: JP6.3 R3.2 U3.15
EN3: JP8.3 R4.2 U4.15
EN4: JP10.3 R5.2 U5.15
EN5: JP12.3 R6.2 U6.15
EN6: JP14.3 R7.2 U7.15
EN7: JP16.3 R8.2 U8.15
EN8: JP18.3 R9.2 U9.15
EN9: JP20.3 R10.2 U10.15
EN10: JP22.3 R11.2 U11.15
EN11: JP24.3 R12.2 U12.15
EN12: JP26.3 R13.2 U13.15
EN13: JP28.3 R14.2 U14.15
EN14: JP30.3 R15.2 U15.15
EN15: JP32.3 R16.2 U16.15
EN16: JP34.3 R17.2 U17.15
EN17: JP36.3 R18.2 U18.15
EN18: JP38.3 R19.2 U19.15
EN19: JP40.3 R20.2 U20.15
EN20: JP42.3 R21.2 U21.15
EN21: JP44.3 R22.2 U22.15
EN22: JP46.3 R23.2 U23.15
EN23: JP48.3 R24.2 U24.15
EN24: JP50.3 R25.2 U25.15
EN25: JP52.3 R26.2 U26.15
EN26: JP54.3 R27.2 U27.15
EN27: JP56.3 R28.2 U28.15
EN28: JP58.3 R29.2 U29.15
EN29: JP60.3 R30.2 U30.15
EN30: JP62.3 R31.2 U31.15
EN31: JP64.3 R32.2 U32.15
EN32: JP66.3 R33.2 U33.15
EN33: JP68.3 R34.2 U34.15
EN34: JP70.3 R35.2 U35.15
EN35: JP72.3 R36.2 U36.15
GND: C1.2 JP3.1 R1.1 U1.12
GND1: C2.2 JP4.1 R2.1 U2.12
GND2: C3.2 JP6.1 R3.1 U3.12
GND3: C4.2 JP8.1 R4.1 U4.12
GND4: C5.2 JP10.1 R5.1 U5.12
GND5: C6.2 JP12.1 R6.1 U6.12
GND6: C7.2 JP14.1 R7.1 U7.12
GND7: C8.2 JP16.1 R8.1 U8.12
GND8: C9.2 JP18.1 R9.1 U9.12
GND9: C10.2 JP20.1 R10.1 U10.12
GND10: C11.2 JP22.1 R11.1 U11.12
GND11: C12.2 JP24.1 R12.1 U12.12
GND12: C13.2 JP26.1 R13.1 U13.12
GND13: C14.2 JP28.1 R14.1 U14.12
GND14: C15.2 JP30.1 R15.1 U15.12
GND15: C16.2 JP32.1 R16.1 U16.12
GND16: C17.2 JP34.1 R17.1 U17.12
GND17: C18.2 JP36.1 R18.1 U18.12
GND18: C19.2 JP38.1 R19.1 U19.12
GND19: C20.2 JP40.1 R20.1 U20.12
GND20: C21.2 JP42.1 R21.1 U21.12
GND21: C22.2 JP44.1 R22.1 U22.12
GND22: C23.2 JP46.1 R23.1 U23.12
GND23: C24.2 JP48.1 R24.1 U24.12
GND24: C25.2 JP50.1 R25.1 U25.12
GND25: C26.2 JP52.1 R26.1 U26.12
GND26: C27.2 JP54.1 R27.1 U27.12
GND27: C28.2 JP56.1 R28.1 U28.12
GND28: C29.2 JP58.1 R29.1 U29.12
GND29: C30.2 JP60.1 R30.1 U30.12
GND30: C31.2 JP62.1 R31.1 U31.12
GND31: C32.2 JP64.1 R32.1 U32.12
GND32: C33.2 JP66.1 R33.1 U33.12
GND33: C34.2 JP68.1 R34.1 U34.12
GND34: C35.2 JP70.1 R35.1 U35.12
GND35: C36.2 JP72.1 R36.1 U36.12
S0: JP3.4 U1.10
S1: JP3.5 U1.11
S2: JP3.6 U1.14
S3: JP3.7 U1.13
S4: JP4.4 U2.10
S5: JP4.5 U2.11
S6: JP4.6 U2.14
S7: JP4.7 U2.13
S8: JP6.4 U3.10
S9: JP6.5 U3.11
S10: JP6.6 U3.14
S11: JP6.7 U3.13
S12: JP8.4 U4.10
S13: JP8.5 U4.11
S14: JP8.6 U4.14
S15: JP8.7 U4.13
S16: JP10.4 U5.10
S17: JP10.5 U5.11
S18: JP10.6 U5.14
S19: JP10.7 U5.13
S20: JP12.4 U6.10
S21: JP12.5 U6.11
S22: JP12.6 U6.14
S23: JP12.7 U6.13
S24: JP14.4 U7.10
S25: JP14.5 U7.11
S26: JP14.6 U7.14
S27: JP14.7 U7.13
S28: JP16.4 U8.10
S29: JP16.5 U8.11
S30: JP16.6 U8.14
S31: JP16.7 U8.13
S32: JP18.4 U9.10
S33: JP18.5 U9.11
S34: JP18.6 U9.14
S35: JP18.7 U9.13
S36: JP20.4 U10.10
S37: JP20.5 U10.11
S38: JP20.6 U10.14
S39: JP20.7 U10.13
S40: JP22.4 U11.10
S41: JP22.5 U11.11
S42: JP22.6 U11.14
S43: JP22.7 U11.13
S44: JP24.4 U12.10
S45: JP24.5 U12.11
S46: JP24.6 U12.14
S47: JP24.7 U12.13
S48: JP26.4 U13.10
S49: JP26.5 U13.11
S50: JP26.6 U13.14
S51: JP26.7 U13.13
S52: JP28.4 U14.10
S53: JP28.5 U14.11
S54: JP28.6 U14.14
S55: JP28.7 U14.13
S56: JP30.4 U15.10
S57: JP30.5 U15.11
S58: JP30.6 U15.14
S59: JP30.7 U15.13
S60: JP32.4 U16.10
S61: JP32.5 U16.11
S62: JP32.6 U16.14
S63: JP32.7 U16.13
S64: JP34.4 U17.10
S65: JP34.5 U17.11
S66: JP34.6 U17.14
S67: JP34.7 U17.13
S68: JP36.4 U18.10
S69: JP36.5 U18.11
S70: JP36.6 U18.14
S71: JP36.7 U18.13
S72: JP38.4 U19.10
S73: JP38.5 U19.11
S74: JP38.6 U19.14
S75: JP38.7 U19.13
S76: JP40.4 U20.10
S77: JP40.5 U20.11
S78: JP40.6 U20.14
S79: JP40.7 U20.13
S80: JP42.4 U21.10
S81: JP42.5 U21.11
S82: JP42.6 U21.14
S83: JP42.7 U21.13
S84: JP44.4 U22.10
S85: JP44.5 U22.11
S86: JP44.6 U22.14
S87: JP44.7 U22.13
S88: JP46.4 U23.10
S89: JP46.5 U23.11
S90: JP46.6 U23.14
S91: JP46.7 U23.13
S92: JP48.4 U24.10
S93: JP48.5 U24.11
S94: JP48.6 U24.14
S95: JP48.7 U24.13
S96: JP50.4 U25.10
S97: JP50.5 U25.11
S98: JP50.6 U25.14
S99: JP50.7 U25.13
S100: JP52.4 U26.10
S101: JP52.5 U26.11
S102: JP52.6 U26.14
S103: JP52.7 U26.13
S104: JP54.4 U27.10
S105: JP54.5 U27.11
S106: JP54.6 U27.14
S107: JP54.7 U27.13
S108: JP56.4 U28.10
S109: JP56.5 U28.11
S110: JP56.6 U28.14
S111: JP56.7 U28.13
S112: JP58.4 U29.10
S113: JP58.5 U29.11
S114: JP58.6 U29.14
S115: JP58.7 U29.13
S116: JP60.4 U30.10
S117: JP60.5 U30.11
S118: JP60.6 U30.14
S119: JP60.7 U30.13
S120: JP62.4 U31.10
S121: JP62.5 U31.11
S122: JP62.6 U31.14
S123: JP62.7 U31.13
S124: JP64.4 U32.10
S125: JP64.5 U32.11
S126: JP64.6 U32.14
S127: JP64.7 U32.13
S128: JP66.4 U33.10
S129: JP66.5 U33.11
S130: JP66.6 U33.14
S131: JP66.7 U33.13
S132: JP68.4 U34.10
S133: JP68.5 U34.11
S134: JP68.6 U34.14
S135: JP68.7 U34.13
S136: JP70.4 U35.10
S137: JP70.5 U35.11
S138: JP70.6 U35.14
S139: JP70.7 U35.13
S140: JP72.4 U36.10
S141: JP72.5 U36.11
S142: JP72.6 U36.14
S143: JP72.7 U36.13
SIG: JP3.8 U1.1
SIG1: JP4.8 U2.1
SIG2: JP6.8 U3.1
SIG3: JP8.8 U4.1
SIG4: JP10.8 U5.1
SIG5: JP12.8 U6.1
SIG6: JP14.8 U7.1
SIG7: JP16.8 U8.1
SIG8: JP18.8 U9.1
SIG9: JP20.8 U10.1
SIG10: JP22.8 U11.1
SIG11: JP24.8 U12.1
SIG12: JP26.8 U13.1
SIG13: JP28.8 U14.1
SIG14: JP30.8 U15.1
SIG15: JP32.8 U16.1
SIG16: JP34.8 U17.1
SIG17: JP36.8 U18.1
SIG18: JP38.8 U19.1
SIG19: JP40.8 U20.1
SIG20: JP42.8 U21.1
SIG21: JP44.8 U22.1
SIG22: JP46.8 U23.1
SIG23: JP48.8 U24.1
SIG24: JP50.8 U25.1
SIG25: JP52.8 U26.1
SIG26: JP54.8 U27.1
SIG27: JP56.8 U28.1
SIG28: JP58.8 U29.1
SIG29: JP60.8 U30.1
SIG30: JP62.8 U31.1
SIG31: JP64.8 U32.1
SIG32: JP66.8 U33.1
SIG33: JP68.8 U34.1
SIG34: JP70.8 U35.1
SIG35: JP72.8 U36.1
VCC: C1.1 JP3.2 U1.24
VCC1: C2.1 JP4.2 U2.24
VCC2: C3.1 JP6.2 U3.24
VCC3: C4.1 JP8.2 U4.24
VCC4: C5.1 JP10.2 U5.24
VCC5: C6.1 JP12.2 U6.24
VCC6: C7.1 JP14.2 U7.24
VCC7: C8.1 JP16.2 U8.24
VCC8: C9.1 JP18.2 U9.24
VCC9: C10.1 JP20.2 U10.24
VCC10: C11.1 JP22.2 U11.24
VCC11: C12.1 JP24.2 U12.24
VCC12: C13.1 JP26.2 U13.24
VCC13: C14.1 JP28.2 U14.24
VCC14: C15.1 JP30.2 U15.24
VCC15: C16.1 JP32.2 U16.24
VCC16: C17.1 JP34.2 U17.24
VCC17: C18.1 JP36.2 U18.24
VCC18: C19.1 JP38.2 U19.24
VCC19: C20.1 JP40.2 U20.24
VCC20: C21.1 JP42.2 U21.24
VCC21: C22.1 JP44.2 U22.24
VCC22: C23.1 JP46.2 U23.24
VCC23: C24.1 JP48.2 U24.24
VCC24: C25.1 JP50.2 U25.24
VCC25: C26.1 JP52.2 U26.24
VCC26: C27.1 JP54.2 U27.24
VCC27: C28.1 JP56.2 U28.24
VCC28: C29.1 JP58.2 U29.24
VCC29: C30.1 JP60.2 U30.24
VCC30: C31.1 JP62.2 U31.24
VCC31: C32.1 JP64.2 U32.24
VCC32: C33.1 JP66.2 U33.24
VCC33: C34.1 JP68.2 U34.24
VCC34: C35.1 JP70.2 U35.24
VCC35: C36.1 JP72.2 U36.24

## Tracks (layer width: path | path; a pad name or v marks a point on that pad's centre or on a via)
C0
  Top 0.254: U1.9 17.37,9.75 15.75,8.13 JP1.1
C1
  Top 0.254: U1.8 16.72,11.64 15.75,10.67 JP1.2
C2
  Top 0.254: U1.7 16.07,14.8 14.48,13.21 JP1.3
C3
  Top 0.254: U1.6 15.42,16.69 14.48,15.75 JP1.4
C4
  Top 0.254: U1.5 14.77,19.85 13.21,18.29 JP1.5
C5
  Top 0.254: U1.4 14.12,21.74 13.21,20.83 JP1.6
C6
  Top 0.254: U1.3 13.47,22.36 13.21,22.1 9.4,22.1 JP1.7
C7
  Top 0.254: U1.2 12.82,25.02 11.94,25.91 JP1.8
C8
  Top 0.254: U1.23 12.82,29.33 11.94,28.45 JP1.9
C9
  Top 0.254: U1.22 13.47,31.99 13.21,32.26 9.4,32.26 JP1.10
C10
  Top 0.254: U1.21 14.12,32.61 13.21,33.53 JP1.11
C11
  Top 0.254: U1.20 14.77,34.5 13.21,36.07 JP1.12
C12
  Top 0.254: U1.19 15.42,37.66 14.48,38.61 JP1.13
C13
  Top 0.254: U1.18 16.07,39.55 14.48,41.15 JP1.14
C14
  Top 0.254: U1.17 16.72,42.71 15.75,43.69 JP1.15
C15
  Top 0.254: U1.16 17.37,44.6 15.75,46.23 JP1.16
C16
  Top 0.254: U2.9 35.66,9.75 34.04,8.13 JP2.1
C17
  Top 0.254: U2.8 35.01,11.64 34.04,10.67 JP2.2
C18
  Top 0.254: U2.7 34.36,14.8 32.77,13.21 JP2.3
C19
  Top 0.254: U2.6 33.71,16.69 32.77,15.75 JP2.4
C20
  Top 0.254: U2.5 33.06,19.85 31.5,18.29 JP2.5
C21
  Top 0.254: U2.4 32.41,21.74 31.5,20.83 JP2.6
C22
  Top 0.254: U2.3 31.76,22.36 31.5,22.1 27.69,22.1 JP2.7
C23
  Top 0.254: U2.2 31.11,25.02 30.23,25.91 JP2.8
C24
  Top 0.254: U2.23 31.11,29.33 30.23,28.45 JP2.9
C25
  Top 0.254: U2.22 31.76,31.99 31.5,32.26 27.69,32.26 JP2.10
C26
  Top 0.254: U2.21 32.41,32.61 31.5,33.53 JP2.11
C27
  Top 0.254: U2.20 33.06,34.5 31.5,36.07 JP2.12
C28
  Top 0.254: U2.19 33.71,37.66 32.77,38.61 JP2.13
C29
  Top 0.254: U2.18 34.36,39.55 32.77,41.15 JP2.14
C30
  Top 0.254: U2.17 35.01,42.71 34.04,43.69 JP2.15
C31
  Top 0.254: U2.16 35.66,44.6 34.04,46.23 JP2.16
C32
  Top 0.254: U3.9 53.95,9.75 52.32,8.13 JP5.1
C33
  Top 0.254: U3.8 53.3,11.64 52.32,10.67 JP5.2
C34
  Top 0.254: U3.7 52.65,14.8 51.05,13.21 JP5.3
C35
  Top 0.254: U3.6 52,16.69 51.05,15.75 JP5.4
C36
  Top 0.254: U3.5 51.35,19.85 49.78,18.29 JP5.5
C37
  Top 0.254: U3.4 50.7,21.74 49.78,20.83 JP5.6
C38
  Top 0.254: U3.3 50.05,22.36 49.78,22.1 45.97,22.1 JP5.7
C39
  Top 0.254: U3.2 49.4,25.02 48.51,25.91 JP5.8
C40
  Top 0.254: U3.23 49.4,29.33 48.51,28.45 JP5.9
C41
  Top 0.254: U3.22 50.05,31.99 49.78,32.26 45.97,32.26 JP5.10
C42
  Top 0.254: U3.21 50.7,32.61 49.78,33.53 JP5.11
C43
  Top 0.254: U3.20 51.35,34.5 49.78,36.07 JP5.12
C44
  Top 0.254: U3.19 52,37.66 51.05,38.61 JP5.13
C45
  Top 0.254: U3.18 52.65,39.55 51.05,41.15 JP5.14
C46
  Top 0.254: U3.17 53.3,42.71 52.32,43.69 JP5.15
C47
  Top 0.254: U3.16 53.95,44.6 52.32,46.23 JP5.16
C48
  Top 0.254: U4.9 72.24,9.75 70.61,8.13 JP7.1
C49
  Top 0.254: U4.8 71.59,11.64 70.61,10.67 JP7.2
C50
  Top 0.254: U4.7 70.94,14.8 69.34,13.21 JP7.3
C51
  Top 0.254: U4.6 70.29,16.69 69.34,15.75 JP7.4
C52
  Top 0.254: U4.5 69.64,19.85 68.07,18.29 JP7.5
C53
  Top 0.254: U4.4 68.99,21.74 68.07,20.83 JP7.6
C54
  Top 0.254: U4.3 68.34,22.36 68.07,22.1 64.26,22.1 JP7.7
C55
  Top 0.254: U4.2 67.69,25.02 66.8,25.91 JP7.8
C56
  Top 0.254: U4.23 67.69,29.33 66.8,28.45 JP7.9
C57
  Top 0.254: U4.22 68.34,31.99 68.07,32.26 64.26,32.26 JP7.10
C58
  Top 0.254: U4.21 68.99,32.61 68.07,33.53 JP7.11
C59
  Top 0.254: U4.20 69.64,34.5 68.07,36.07 JP7.12
C60
  Top 0.254: U4.19 70.29,37.66 69.34,38.61 JP7.13
C61
  Top 0.254: U4.18 70.94,39.55 69.34,41.15 JP7.14
C62
  Top 0.254: U4.17 71.59,42.71 70.61,43.69 JP7.15
C63
  Top 0.254: U4.16 72.24,44.6 70.61,46.23 JP7.16
C64
  Top 0.254: U5.9 90.53,9.75 88.9,8.13 JP9.1
C65
  Top 0.254: U5.8 89.88,11.64 88.9,10.67 JP9.2
C66
  Top 0.254: U5.7 89.22,14.8 87.63,13.21 JP9.3
C67
  Top 0.254: U5.6 88.58,16.69 87.63,15.75 JP9.4
C68
  Top 0.254: U5.5 87.92,19.85 86.36,18.29 JP9.5
C69
  Top 0.254: U5.4 87.28,21.74 86.36,20.83 JP9.6
C70
  Top 0.254: U5.3 86.62,22.36 86.36,22.1 82.55,22.1 JP9.7
C71
  Top 0.254: U5.2 85.97,25.02 85.09,25.91 JP9.8
C72
  Top 0.254: U5.23 85.97,29.33 85.09,28.45 JP9.9
C73
  Top 0.254: U5.22 86.62,31.99 86.36,32.26 82.55,32.26 JP9.10
C74
  Top 0.254: U5.21 87.28,32.61 86.36,33.53 JP9.11
C75
  Top 0.254: U5.20 87.92,34.5 86.36,36.07 JP9.12
C76
  Top 0.254: U5.19 88.58,37.66 87.63,38.61 JP9.13
C77
  Top 0.254: U5.18 89.22,39.55 87.63,41.15 JP9.14
C78
  Top 0.254: U5.17 89.88,42.71 88.9,43.69 JP9.15
C79
  Top 0.254: U5.16 90.53,44.6 88.9,46.23 JP9.16
C80
  Top 0.254: U6.9 108.81,9.75 107.19,8.13 JP11.1
C81
  Top 0.254: U6.8 108.16,11.64 107.19,10.67 JP11.2
C82
  Top 0.254: U6.7 107.51,14.8 105.92,13.21 JP11.3
C83
  Top 0.254: U6.6 106.86,16.69 105.92,15.75 JP11.4
C84
  Top 0.254: U6.5 106.21,19.85 104.65,18.29 JP11.5
C85
  Top 0.254: U6.4 105.56,21.74 104.65,20.83 JP11.6
C86
  Top 0.254: U6.3 104.91,22.36 104.65,22.1 100.84,22.1 JP11.7
C87
  Top 0.254: U6.2 104.26,25.02 103.38,25.91 JP11.8
C88
  Top 0.254: U6.23 104.26,29.33 103.38,28.45 JP11.9
C89
  Top 0.254: U6.22 104.91,31.99 104.65,32.26 100.84,32.26 JP11.10
C90
  Top 0.254: U6.21 105.56,32.61 104.65,33.53 JP11.11
C91
  Top 0.254: U6.20 106.21,34.5 104.65,36.07 JP11.12
C92
  Top 0.254: U6.19 106.86,37.66 105.92,38.61 JP11.13
C93
  Top 0.254: U6.18 107.51,39.55 105.92,41.15 JP11.14
C94
  Top 0.254: U6.17 108.16,42.71 107.19,43.69 JP11.15
C95
  Top 0.254: U6.16 108.81,44.6 107.19,46.23 JP11.16
C96
  Top 0.254: U7.9 127.1,9.75 125.48,8.13 JP13.1
C97
  Top 0.254: U7.8 126.45,11.64 125.48,10.67 JP13.2
C98
  Top 0.254: U7.7 125.8,14.8 124.21,13.21 JP13.3
C99
  Top 0.254: U7.6 125.15,16.69 124.21,15.75 JP13.4
C100
  Top 0.254: U7.5 124.5,19.85 122.94,18.29 JP13.5
C101
  Top 0.254: U7.4 123.85,21.74 122.94,20.83 JP13.6
C102
  Top 0.254: U7.3 123.2,22.36 122.94,22.1 119.13,22.1 JP13.7
C103
  Top 0.254: U7.2 122.55,25.02 121.67,25.91 JP13.8
C104
  Top 0.254: U7.23 122.55,29.33 121.67,28.45 JP13.9
C105
  Top 0.254: U7.22 123.2,31.99 122.94,32.26 119.13,32.26 JP13.10
C106
  Top 0.254: U7.21 123.85,32.61 122.94,33.53 JP13.11
C107
  Top 0.254: U7.20 124.5,34.5 122.94,36.07 JP13.12
C108
  Top 0.254: U7.19 125.15,37.66 124.21,38.61 JP13.13
C109
  Top 0.254: U7.18 125.8,39.55 124.21,41.15 JP13.14
C110
  Top 0.254: U7.17 126.45,42.71 125.48,43.69 JP13.15
C111
  Top 0.254: U7.16 127.1,44.6 125.48,46.23 JP13.16
C112
  Top 0.254: U8.9 145.39,9.75 143.76,8.13 JP15.1
C113
  Top 0.254: U8.8 144.74,11.64 143.76,10.67 JP15.2
C114
  Top 0.254: U8.7 144.09,14.8 142.49,13.21 JP15.3
C115
  Top 0.254: U8.6 143.44,16.69 142.49,15.75 JP15.4
C116
  Top 0.254: U8.5 142.79,19.85 141.22,18.29 JP15.5
C117
  Top 0.254: U8.4 142.14,21.74 141.22,20.83 JP15.6
C118
  Top 0.254: U8.3 141.49,22.36 141.22,22.1 137.41,22.1 JP15.7
C119
  Top 0.254: U8.2 140.84,25.02 139.95,25.91 JP15.8
C120
  Top 0.254: U8.23 140.84,29.33 139.95,28.45 JP15.9
C121
  Top 0.254: U8.22 141.49,31.99 141.22,32.26 137.41,32.26 JP15.10
C122
  Top 0.254: U8.21 142.14,32.61 141.22,33.53 JP15.11
C123
  Top 0.254: U8.20 142.79,34.5 141.22,36.07 JP15.12
C124
  Top 0.254: U8.19 143.44,37.66 142.49,38.61 JP15.13
C125
  Top 0.254: U8.18 144.09,39.55 142.49,41.15 JP15.14
C126
  Top 0.254: U8.17 144.74,42.71 143.76,43.69 JP15.15
C127
  Top 0.254: U8.16 145.39,44.6 143.76,46.23 JP15.16
C128
  Top 0.254: U9.9 163.68,9.75 162.05,8.13 JP17.1
C129
  Top 0.254: U9.8 163.03,11.64 162.05,10.67 JP17.2
C130
  Top 0.254: U9.7 162.38,14.8 160.78,13.21 JP17.3
C131
  Top 0.254: U9.6 161.73,16.69 160.78,15.75 JP17.4
C132
  Top 0.254: U9.5 161.08,19.85 159.51,18.29 JP17.5
C133
  Top 0.254: U9.4 160.43,21.74 159.51,20.83 JP17.6
C134
  Top 0.254: U9.3 159.78,22.36 159.51,22.1 155.7,22.1 JP17.7
C135
  Top 0.254: U9.2 159.13,25.02 158.24,25.91 JP17.8
C136
  Top 0.254: U9.23 159.13,29.33 158.24,28.45 JP17.9
C137
  Top 0.254: U9.22 159.78,31.99 159.51,32.26 155.7,32.26 JP17.10
C138
  Top 0.254: U9.21 160.43,32.61 159.51,33.53 JP17.11
C139
  Top 0.254: U9.20 161.08,34.5 159.51,36.07 JP17.12
C140
  Top 0.254: U9.19 161.73,37.66 160.78,38.61 JP17.13
C141
  Top 0.254: U9.18 162.38,39.55 160.78,41.15 JP17.14
C142
  Top 0.254: U9.17 163.03,42.71 162.05,43.69 JP17.15
C143
  Top 0.254: U9.16 163.68,44.6 162.05,46.23 JP17.16
C144
  Top 0.254: U10.9 181.97,9.75 180.34,8.13 JP19.1
C145
  Top 0.254: U10.8 181.31,11.64 180.34,10.67 JP19.2
C146
  Top 0.254: U10.7 180.66,14.8 179.07,13.21 JP19.3
C147
  Top 0.254: U10.6 180.01,16.69 179.07,15.75 JP19.4
C148
  Top 0.254: U10.5 179.37,19.85 177.8,18.29 JP19.5
C149
  Top 0.254: U10.4 178.72,21.74 177.8,20.83 JP19.6
C150
  Top 0.254: U10.3 178.06,22.36 177.8,22.1 173.99,22.1 JP19.7
C151
  Top 0.254: U10.2 177.41,25.02 176.53,25.91 JP19.8
C152
  Top 0.254: U10.23 177.41,29.33 176.53,28.45 JP19.9
C153
  Top 0.254: U10.22 178.06,31.99 177.8,32.26 173.99,32.26 JP19.10
C154
  Top 0.254: U10.21 178.72,32.61 177.8,33.53 JP19.11
C155
  Top 0.254: U10.20 179.37,34.5 177.8,36.07 JP19.12
C156
  Top 0.254: U10.19 180.01,37.66 179.07,38.61 JP19.13
C157
  Top 0.254: U10.18 180.66,39.55 179.07,41.15 JP19.14
C158
  Top 0.254: U10.17 181.31,42.71 180.34,43.69 JP19.15
C159
  Top 0.254: U10.16 181.97,44.6 180.34,46.23 JP19.16
C160
  Top 0.254: U11.9 200.25,9.75 198.63,8.13 JP21.1
C161
  Top 0.254: U11.8 199.6,11.64 198.63,10.67 JP21.2
C162
  Top 0.254: U11.7 198.95,14.8 197.36,13.21 JP21.3
C163
  Top 0.254: U11.6 198.3,16.69 197.36,15.75 JP21.4
C164
  Top 0.254: U11.5 197.65,19.85 196.09,18.29 JP21.5
C165
  Top 0.254: U11.4 197,21.74 196.09,20.83 JP21.6
C166
  Top 0.254: U11.3 196.35,22.36 196.09,22.1 192.28,22.1 JP21.7
C167
  Top 0.254: U11.2 195.7,25.02 194.82,25.91 JP21.8
C168
  Top 0.254: U11.23 195.7,29.33 194.82,28.45 JP21.9
C169
  Top 0.254: U11.22 196.35,31.99 196.09,32.26 192.28,32.26 JP21.10
C170
  Top 0.254: U11.21 197,32.61 196.09,33.53 JP21.11
C171
  Top 0.254: U11.20 197.65,34.5 196.09,36.07 JP21.12
C172
  Top 0.254: U11.19 198.3,37.66 197.36,38.61 JP21.13
C173
  Top 0.254: U11.18 198.95,39.55 197.36,41.15 JP21.14
C174
  Top 0.254: U11.17 199.6,42.71 198.63,43.69 JP21.15
C175
  Top 0.254: U11.16 200.25,44.6 198.63,46.23 JP21.16
C176
  Top 0.254: U12.9 218.54,9.75 216.92,8.13 JP23.1
C177
  Top 0.254: U12.8 217.89,11.64 216.92,10.67 JP23.2
C178
  Top 0.254: U12.7 217.24,14.8 215.65,13.21 JP23.3
C179
  Top 0.254: U12.6 216.59,16.69 215.65,15.75 JP23.4
C180
  Top 0.254: U12.5 215.94,19.85 214.38,18.29 JP23.5
C181
  Top 0.254: U12.4 215.29,21.74 214.38,20.83 JP23.6
C182
  Top 0.254: U12.3 214.64,22.36 214.38,22.1 210.57,22.1 JP23.7
C183
  Top 0.254: U12.2 213.99,25.02 213.11,25.91 JP23.8
C184
  Top 0.254: U12.23 213.99,29.33 213.11,28.45 JP23.9
C185
  Top 0.254: U12.22 214.64,31.99 214.38,32.26 210.57,32.26 JP23.10
C186
  Top 0.254: U12.21 215.29,32.61 214.38,33.53 JP23.11
C187
  Top 0.254: U12.20 215.94,34.5 214.38,36.07 JP23.12
C188
  Top 0.254: U12.19 216.59,37.66 215.65,38.61 JP23.13
C189
  Top 0.254: U12.18 217.24,39.55 215.65,41.15 JP23.14
C190
  Top 0.254: U12.17 217.89,42.71 216.92,43.69 JP23.15
C191
  Top 0.254: U12.16 218.54,44.6 216.92,46.23 JP23.16
C192
  Top 0.254: U13.9 17.37,50.9 15.75,49.28 JP25.1
C193
  Top 0.254: U13.8 16.72,52.79 15.75,51.82 JP25.2
C194
  Top 0.254: U13.7 16.07,55.95 14.48,54.36 JP25.3
C195
  Top 0.254: U13.6 15.42,57.84 14.48,56.9 JP25.4
C196
  Top 0.254: U13.5 14.77,61 13.21,59.44 JP25.5
C197
  Top 0.254: U13.4 14.12,62.89 13.21,61.98 JP25.6
C198
  Top 0.254: U13.3 13.47,63.51 13.21,63.25 9.4,63.25 JP25.7
C199
  Top 0.254: U13.2 12.82,66.17 11.94,67.06 JP25.8
C200
  Top 0.254: U13.23 12.82,70.48 11.94,69.6 JP25.9
C201
  Top 0.254: U13.22 13.47,73.14 13.21,73.41 9.4,73.41 JP25.10
C202
  Top 0.254: U13.21 14.12,73.76 13.21,74.68 JP25.11
C203
  Top 0.254: U13.20 14.77,75.65 13.21,77.22 JP25.12
C204
  Top 0.254: U13.19 15.42,78.81 14.48,79.76 JP25.13
C205
  Top 0.254: U13.18 16.07,80.7 14.48,82.3 JP25.14
C206
  Top 0.254: U13.17 16.72,83.86 15.75,84.84 JP25.15
C207
  Top 0.254: U13.16 17.37,85.75 15.75,87.38 JP25.16
C208
  Top 0.254: U14.9 35.66,50.9 34.04,49.28 JP27.1
C209
  Top 0.254: U14.8 35.01,52.79 34.04,51.82 JP27.2
C210
  Top 0.254: U14.7 34.36,55.95 32.77,54.36 JP27.3
C211
  Top 0.254: U14.6 33.71,57.84 32.77,56.9 JP27.4
C212
  Top 0.254: U14.5 33.06,61 31.5,59.44 JP27.5
C213
  Top 0.254: U14.4 32.41,62.89 31.5,61.98 JP27.6
C214
  Top 0.254: U14.3 31.76,63.51 31.5,63.25 27.69,63.25 JP27.7
C215
  Top 0.254: U14.2 31.11,66.17 30.23,67.06 JP27.8
C216
  Top 0.254: U14.23 31.11,70.48 30.23,69.6 JP27.9
C217
  Top 0.254: U14.22 31.76,73.14 31.5,73.41 27.69,73.41 JP27.10
C218
  Top 0.254: U14.21 32.41,73.76 31.5,74.68 JP27.11
C219
  Top 0.254: U14.20 33.06,75.65 31.5,77.22 JP27.12
C220
  Top 0.254: U14.19 33.71,78.81 32.77,79.76 JP27.13
C221
  Top 0.254: U14.18 34.36,80.7 32.77,82.3 JP27.14
C222
  Top 0.254: U14.17 35.01,83.86 34.04,84.84 JP27.15
C223
  Top 0.254: U14.16 35.66,85.75 34.04,87.38 JP27.16
C224
  Top 0.254: U15.9 53.95,50.9 52.32,49.28 JP29.1
C225
  Top 0.254: U15.8 53.3,52.79 52.32,51.82 JP29.2